# Altium PCB BugBusterMain.PcbDoc (part 1 of 6)
Units mm, origin at the board's own origin, x right, y up, seen from the top; angles counter-clockwise.
Board outline 110 x 80 mm, 6 copper layers (Top Layer, Inner Layer 1, Inner Layer 2, Inner Layer 3, Inner Layer 4, Bottom Layer), stack 1.546 mm thick; 244 components, 246 nets, 1173 pads, 1169 vias.
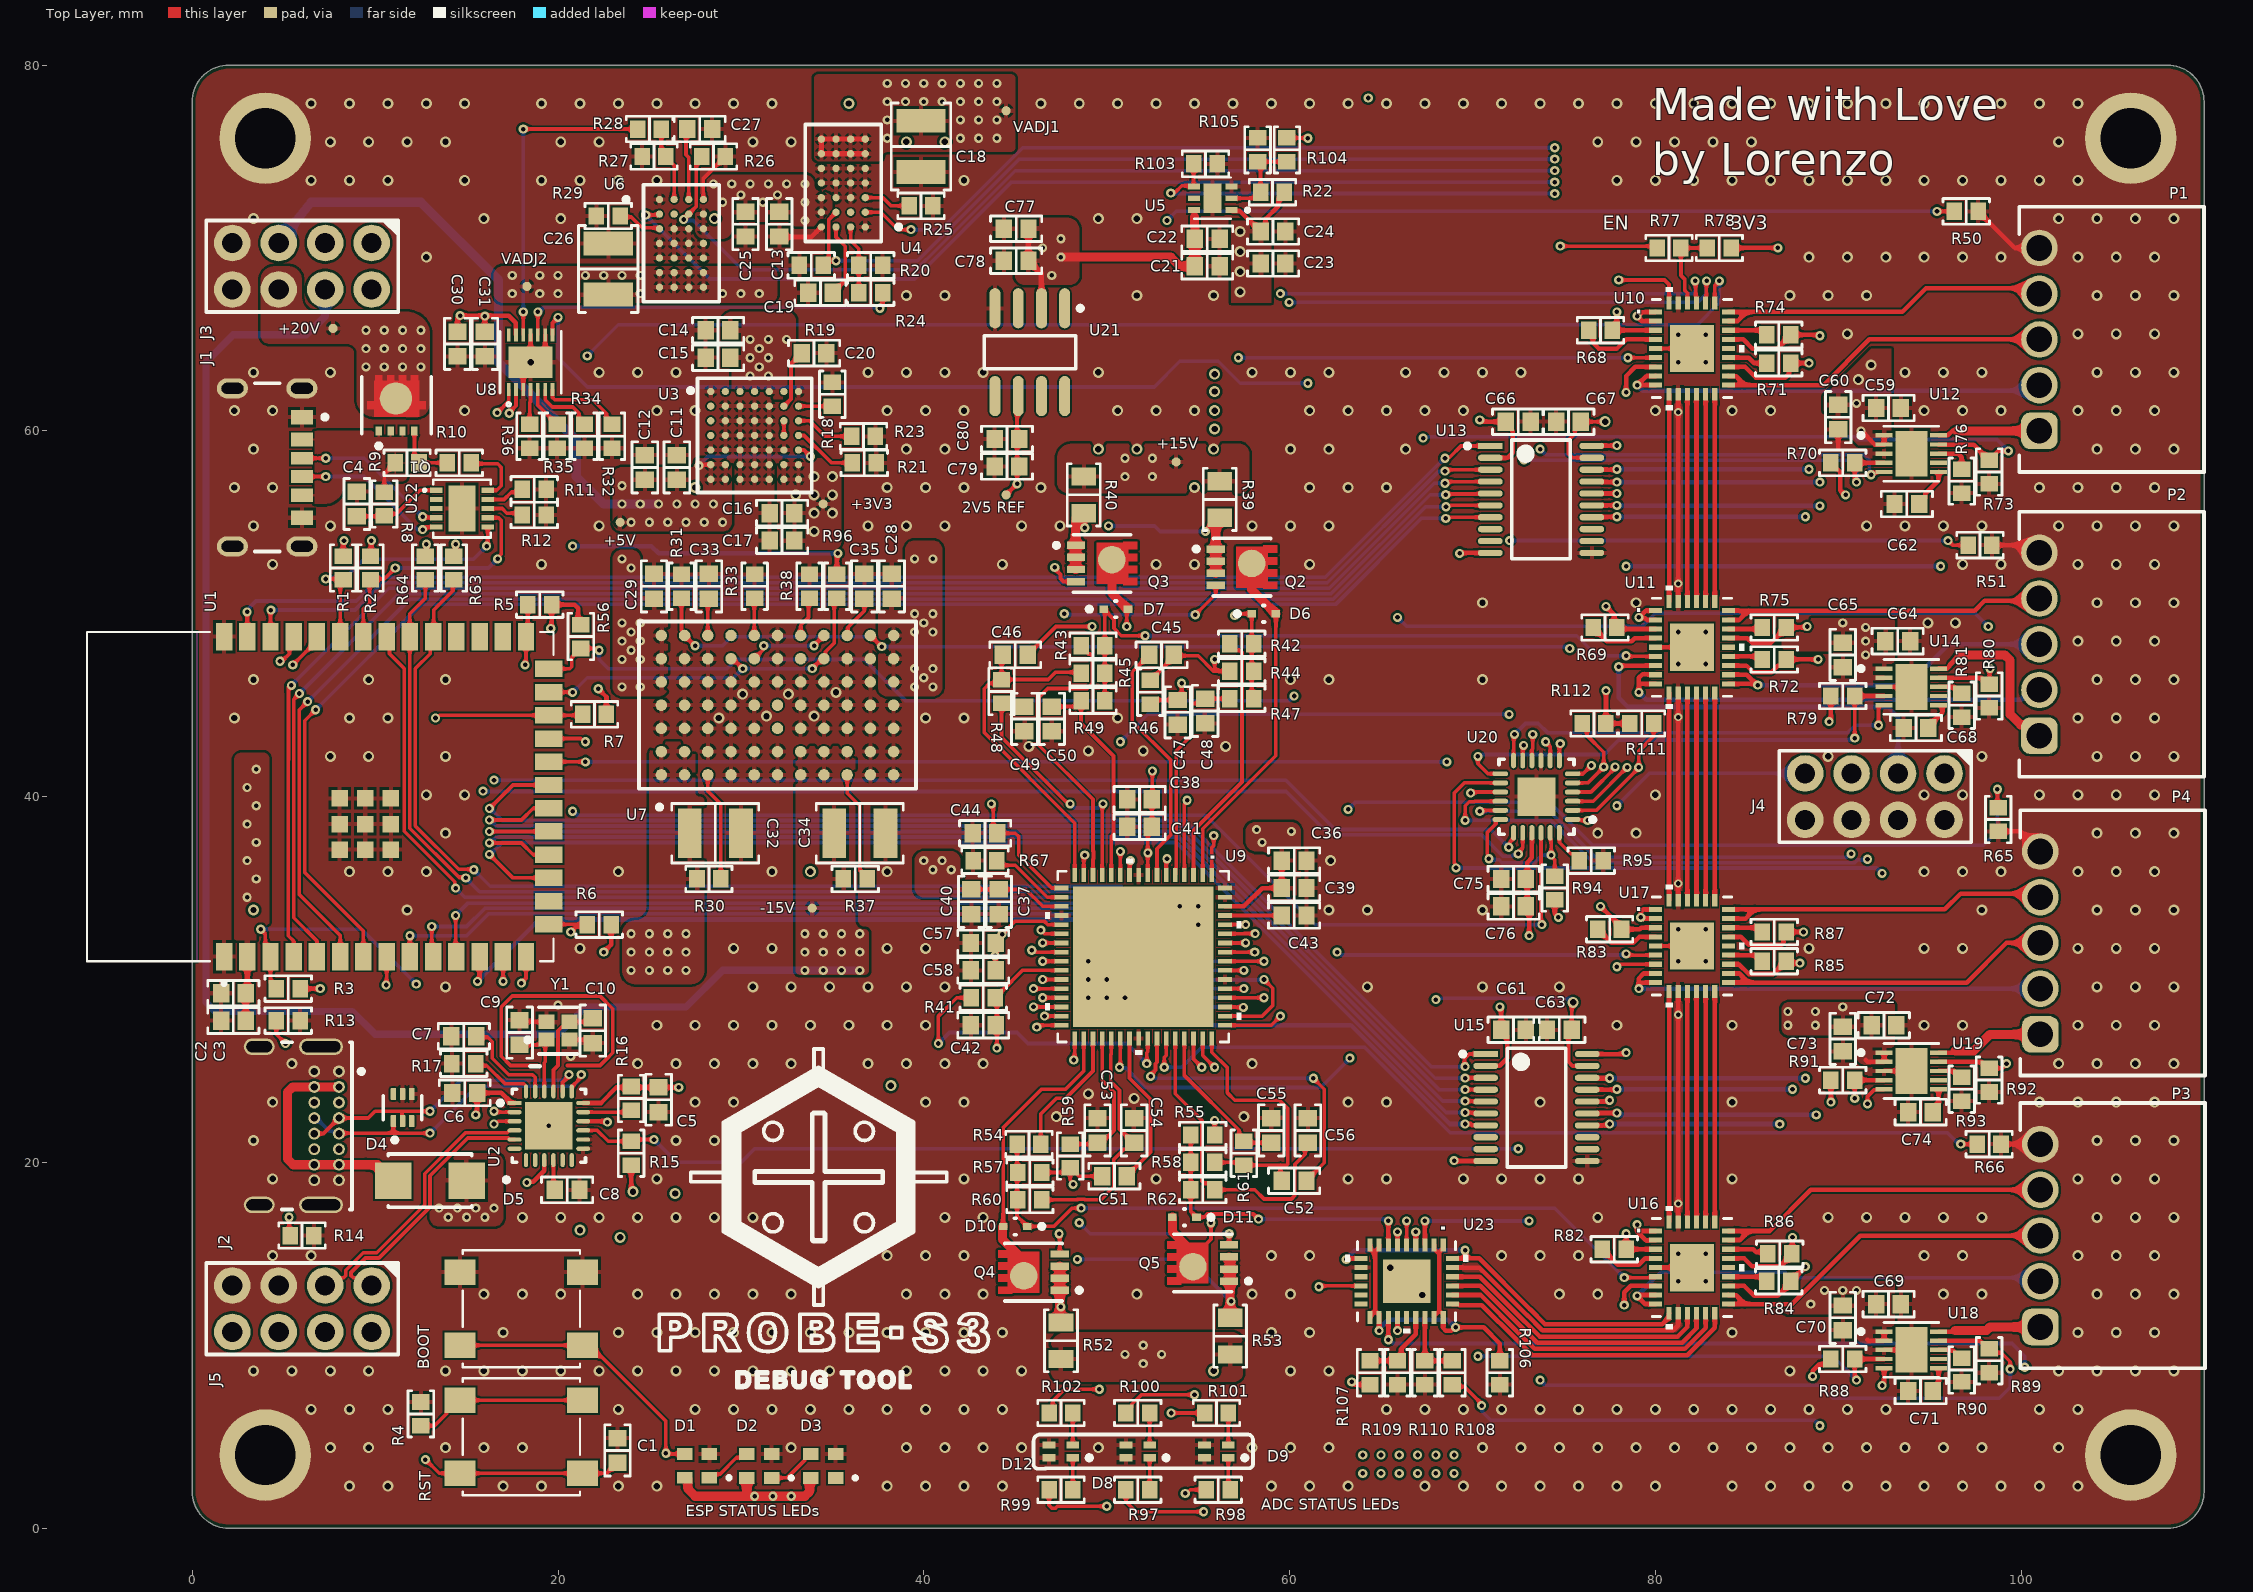
[diagram p0: Top Layer view]
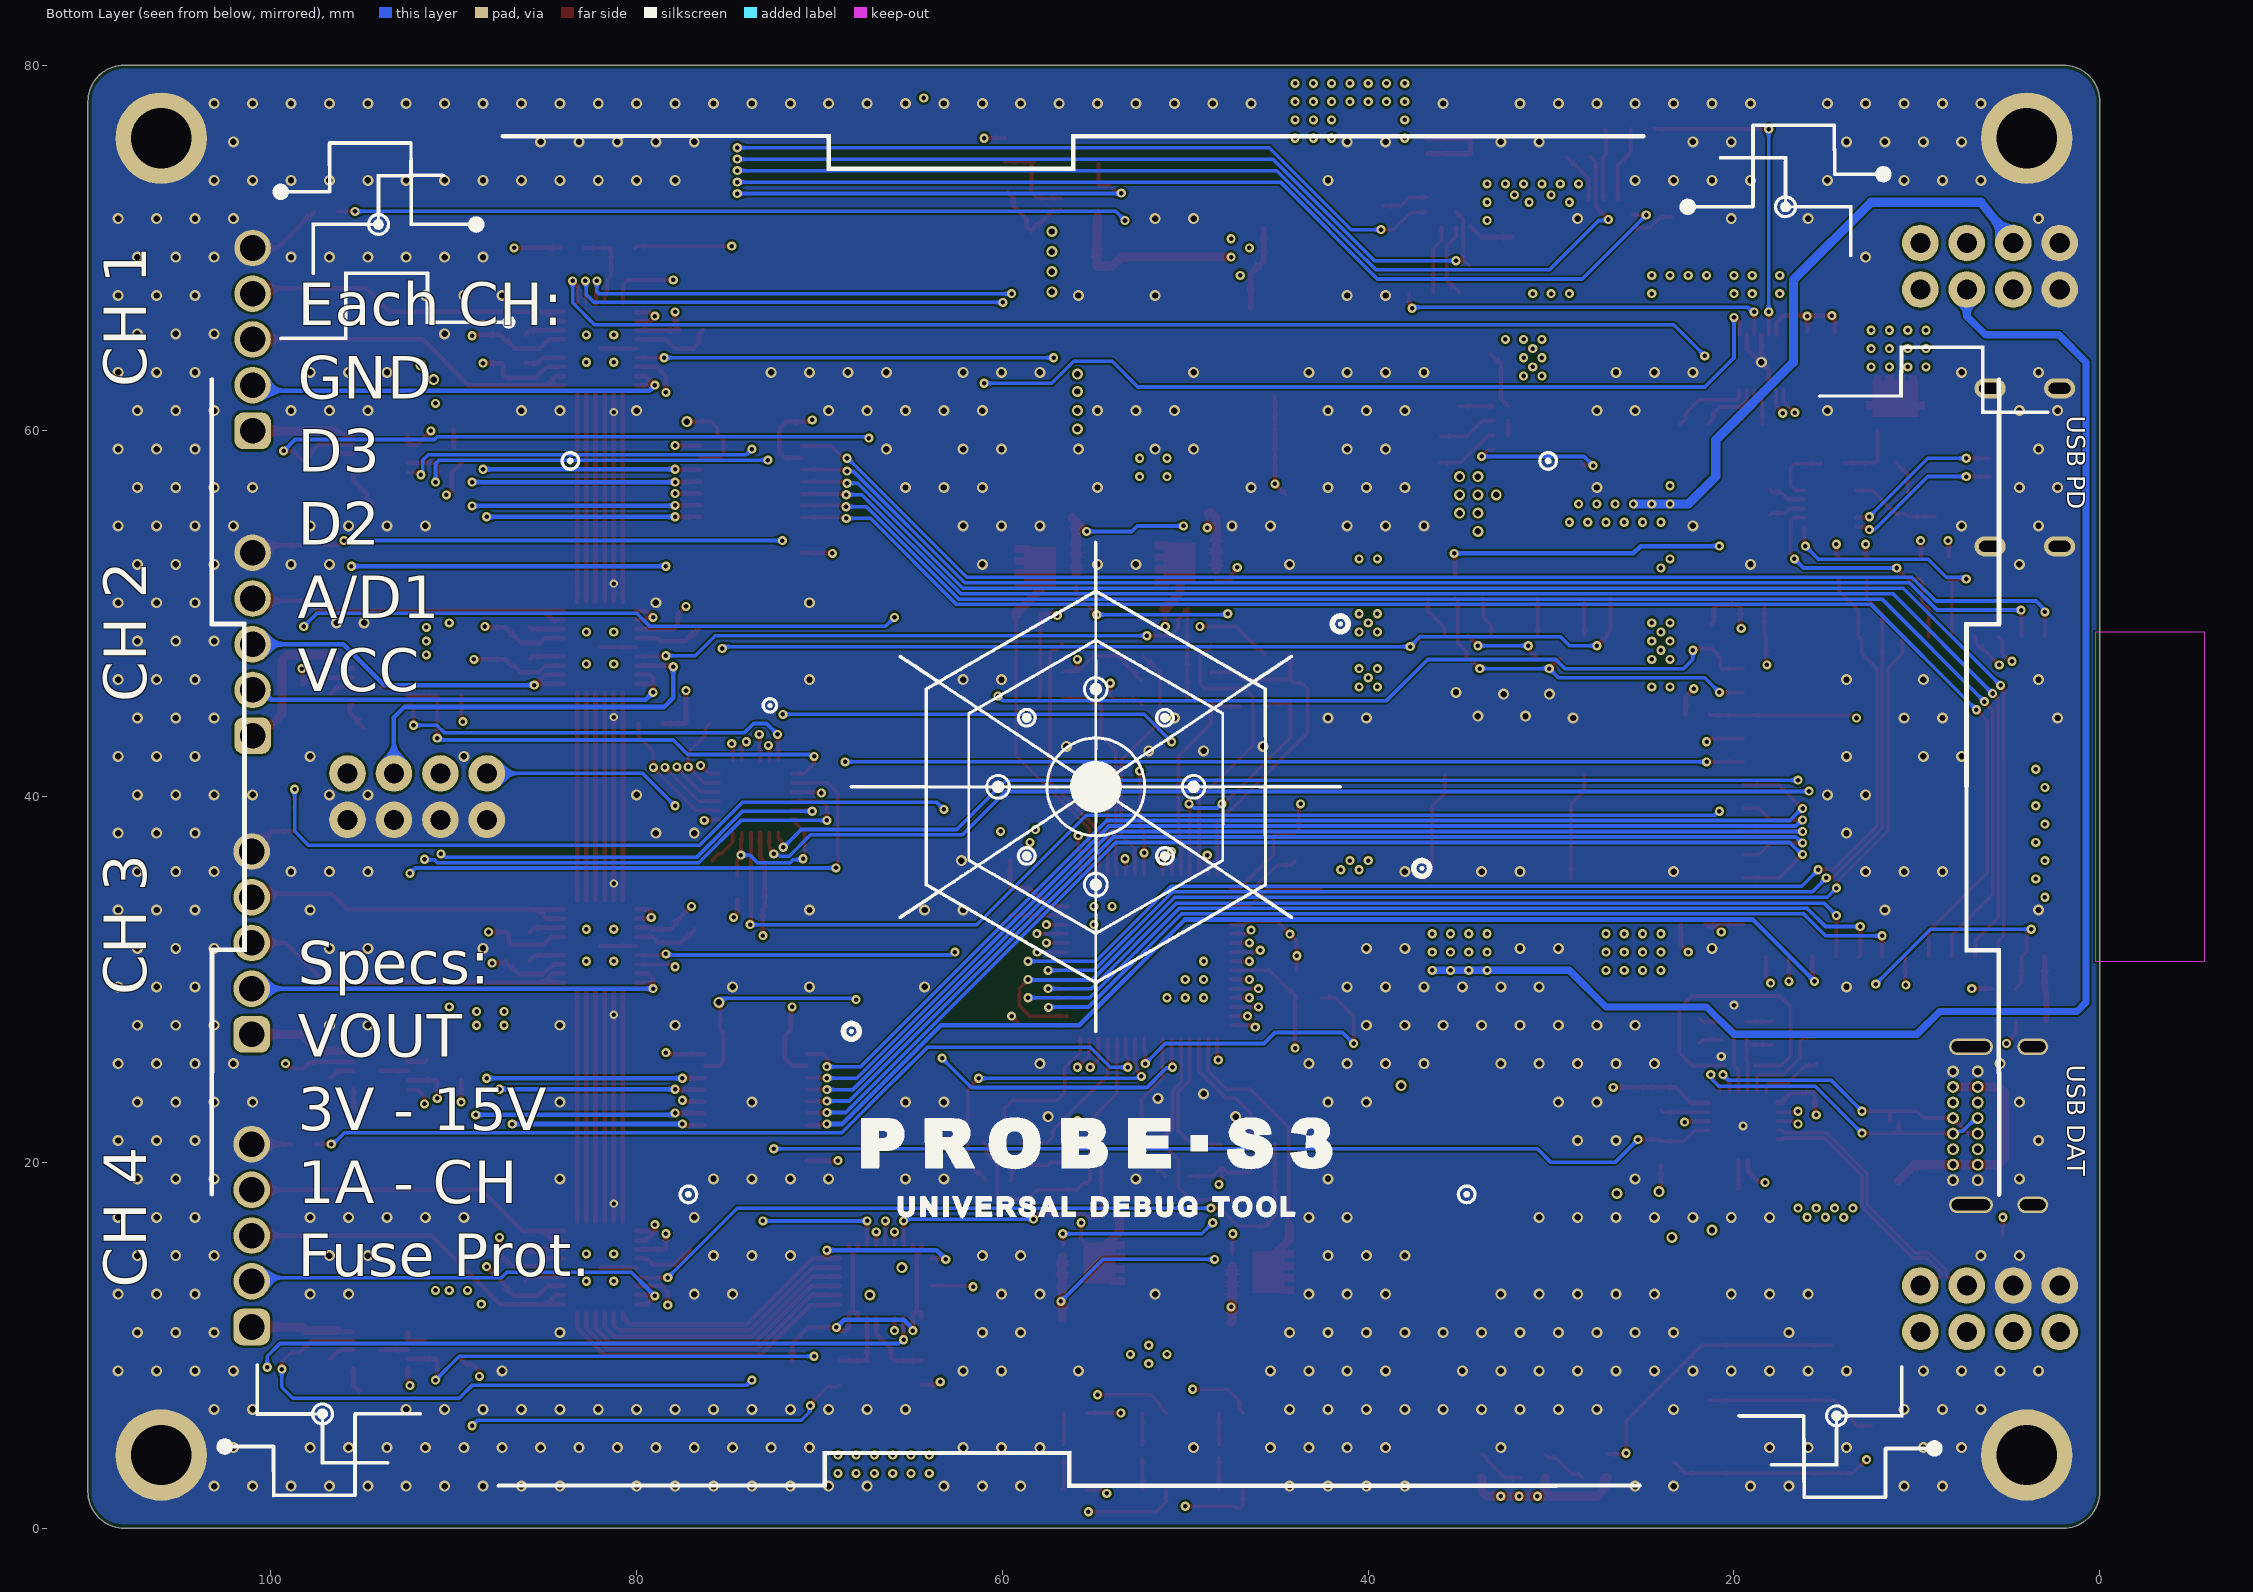
[diagram p1: Bottom Layer view, seen from below]
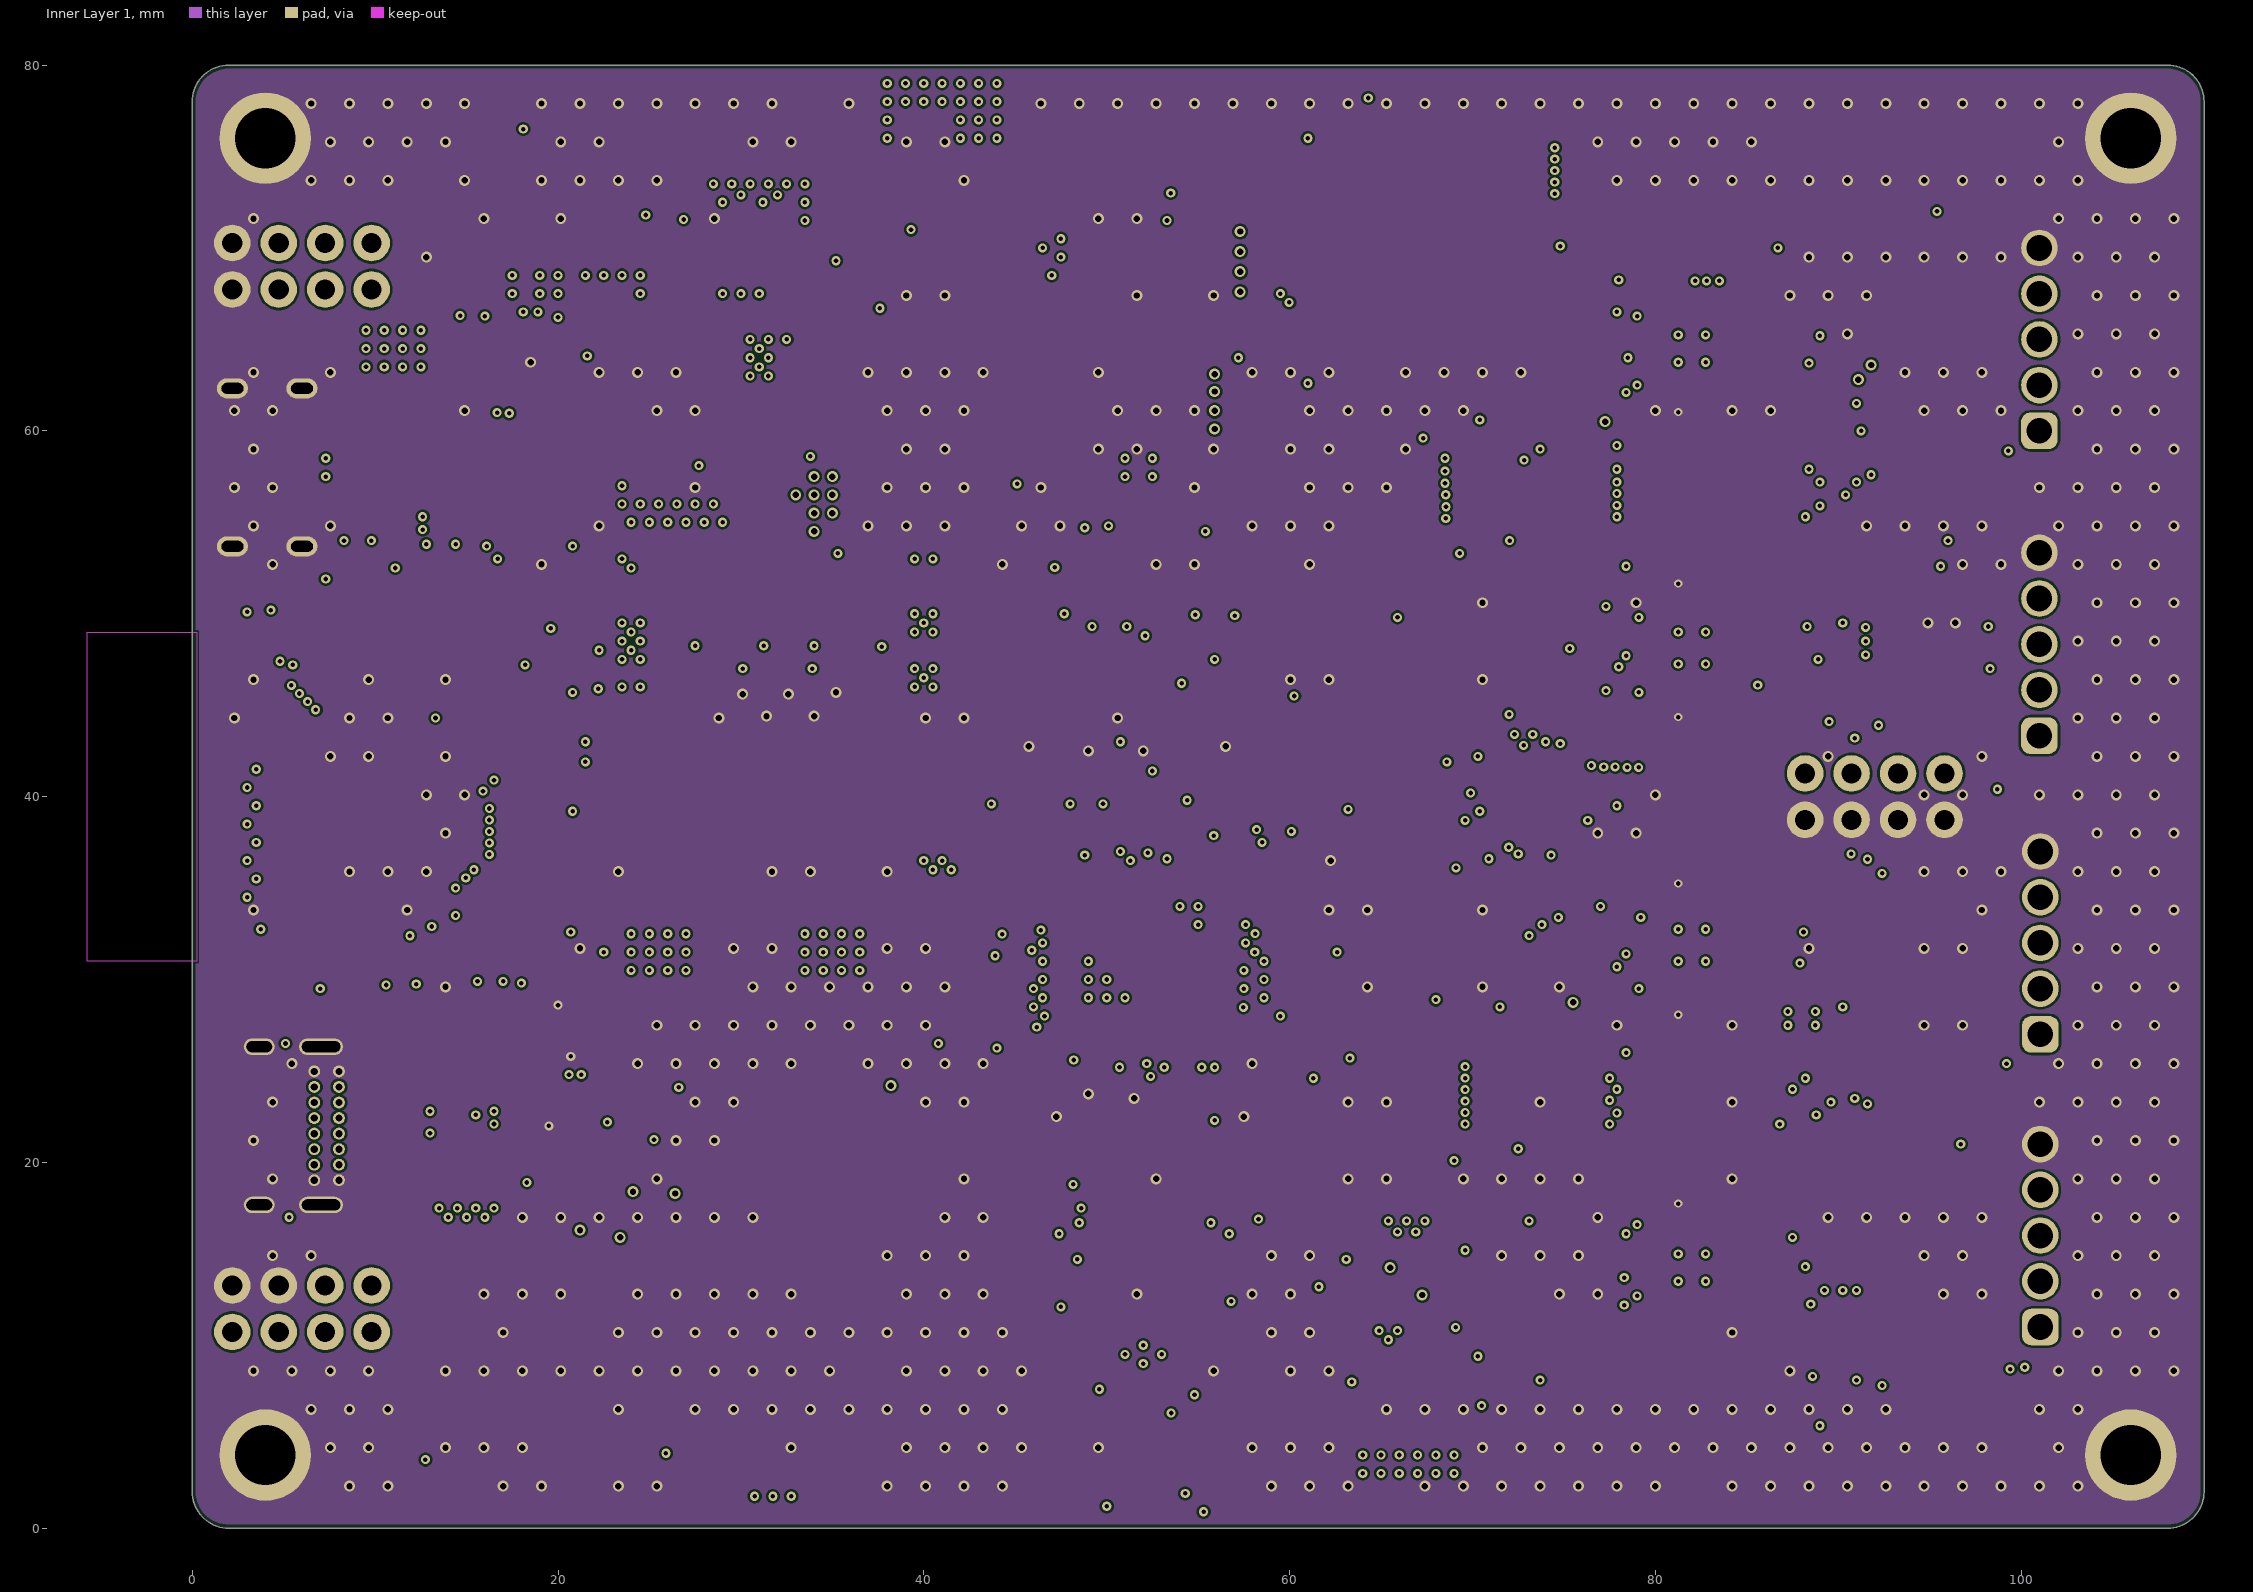
[diagram p2: Inner Layer 1]
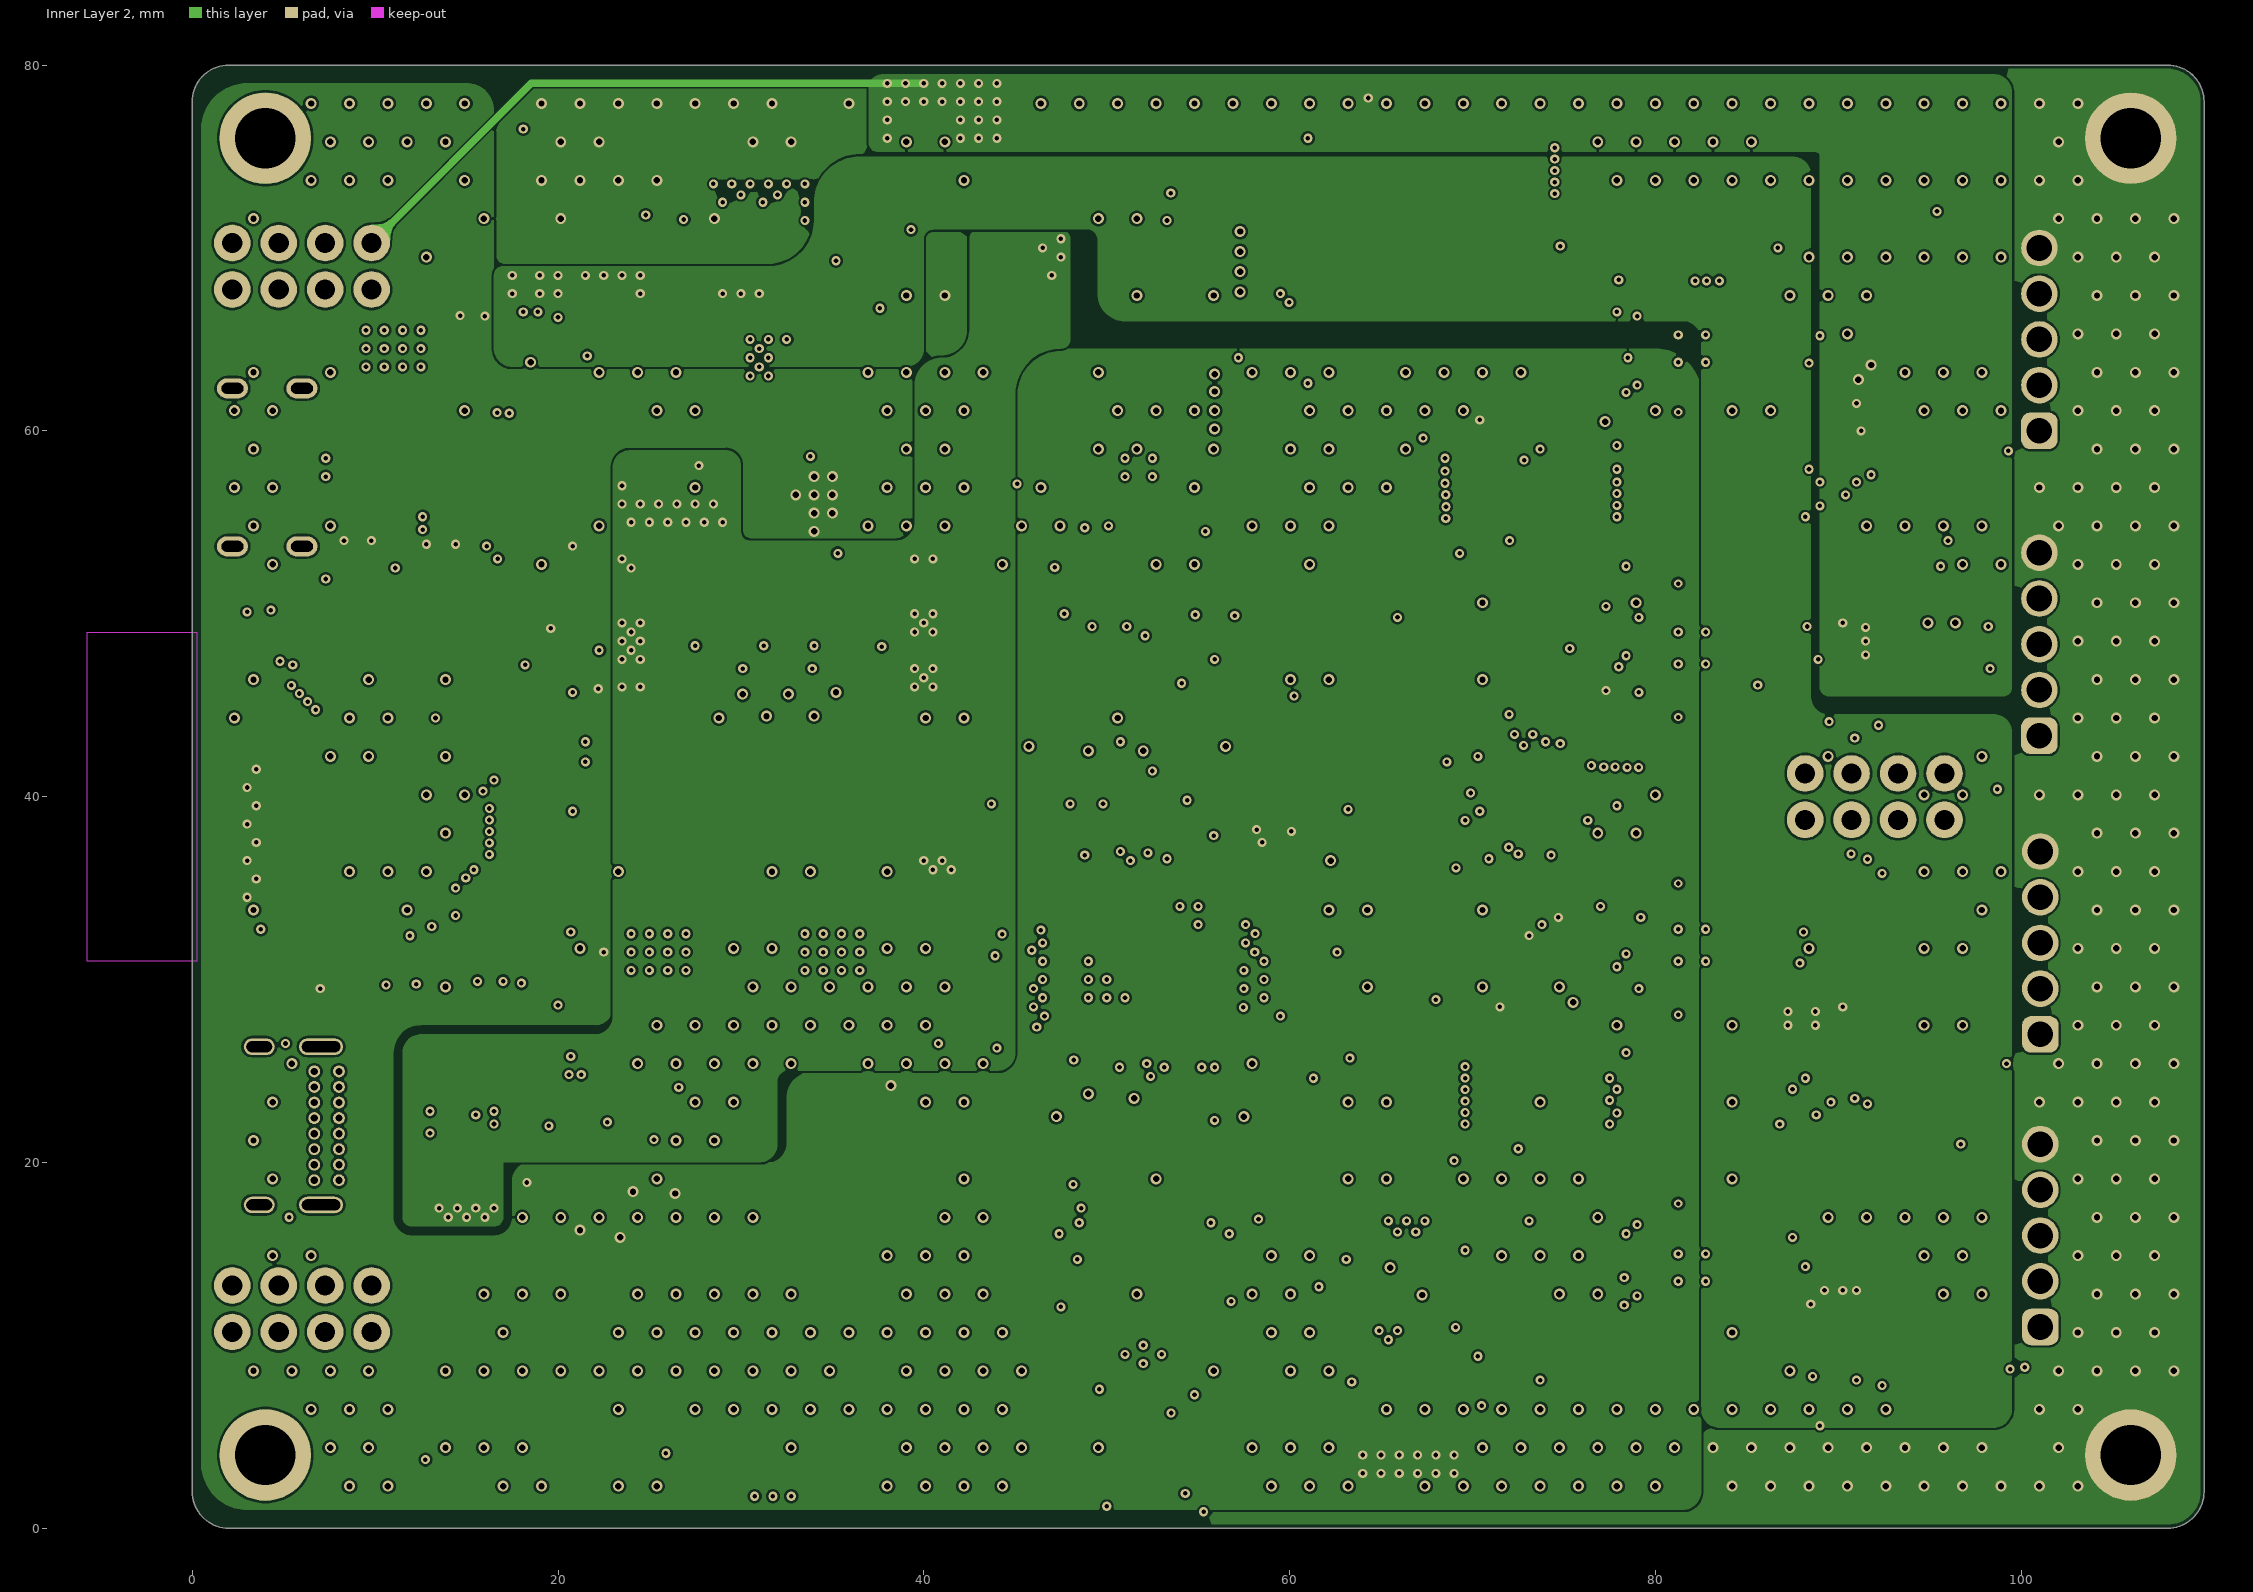
[diagram p3: Inner Layer 2]
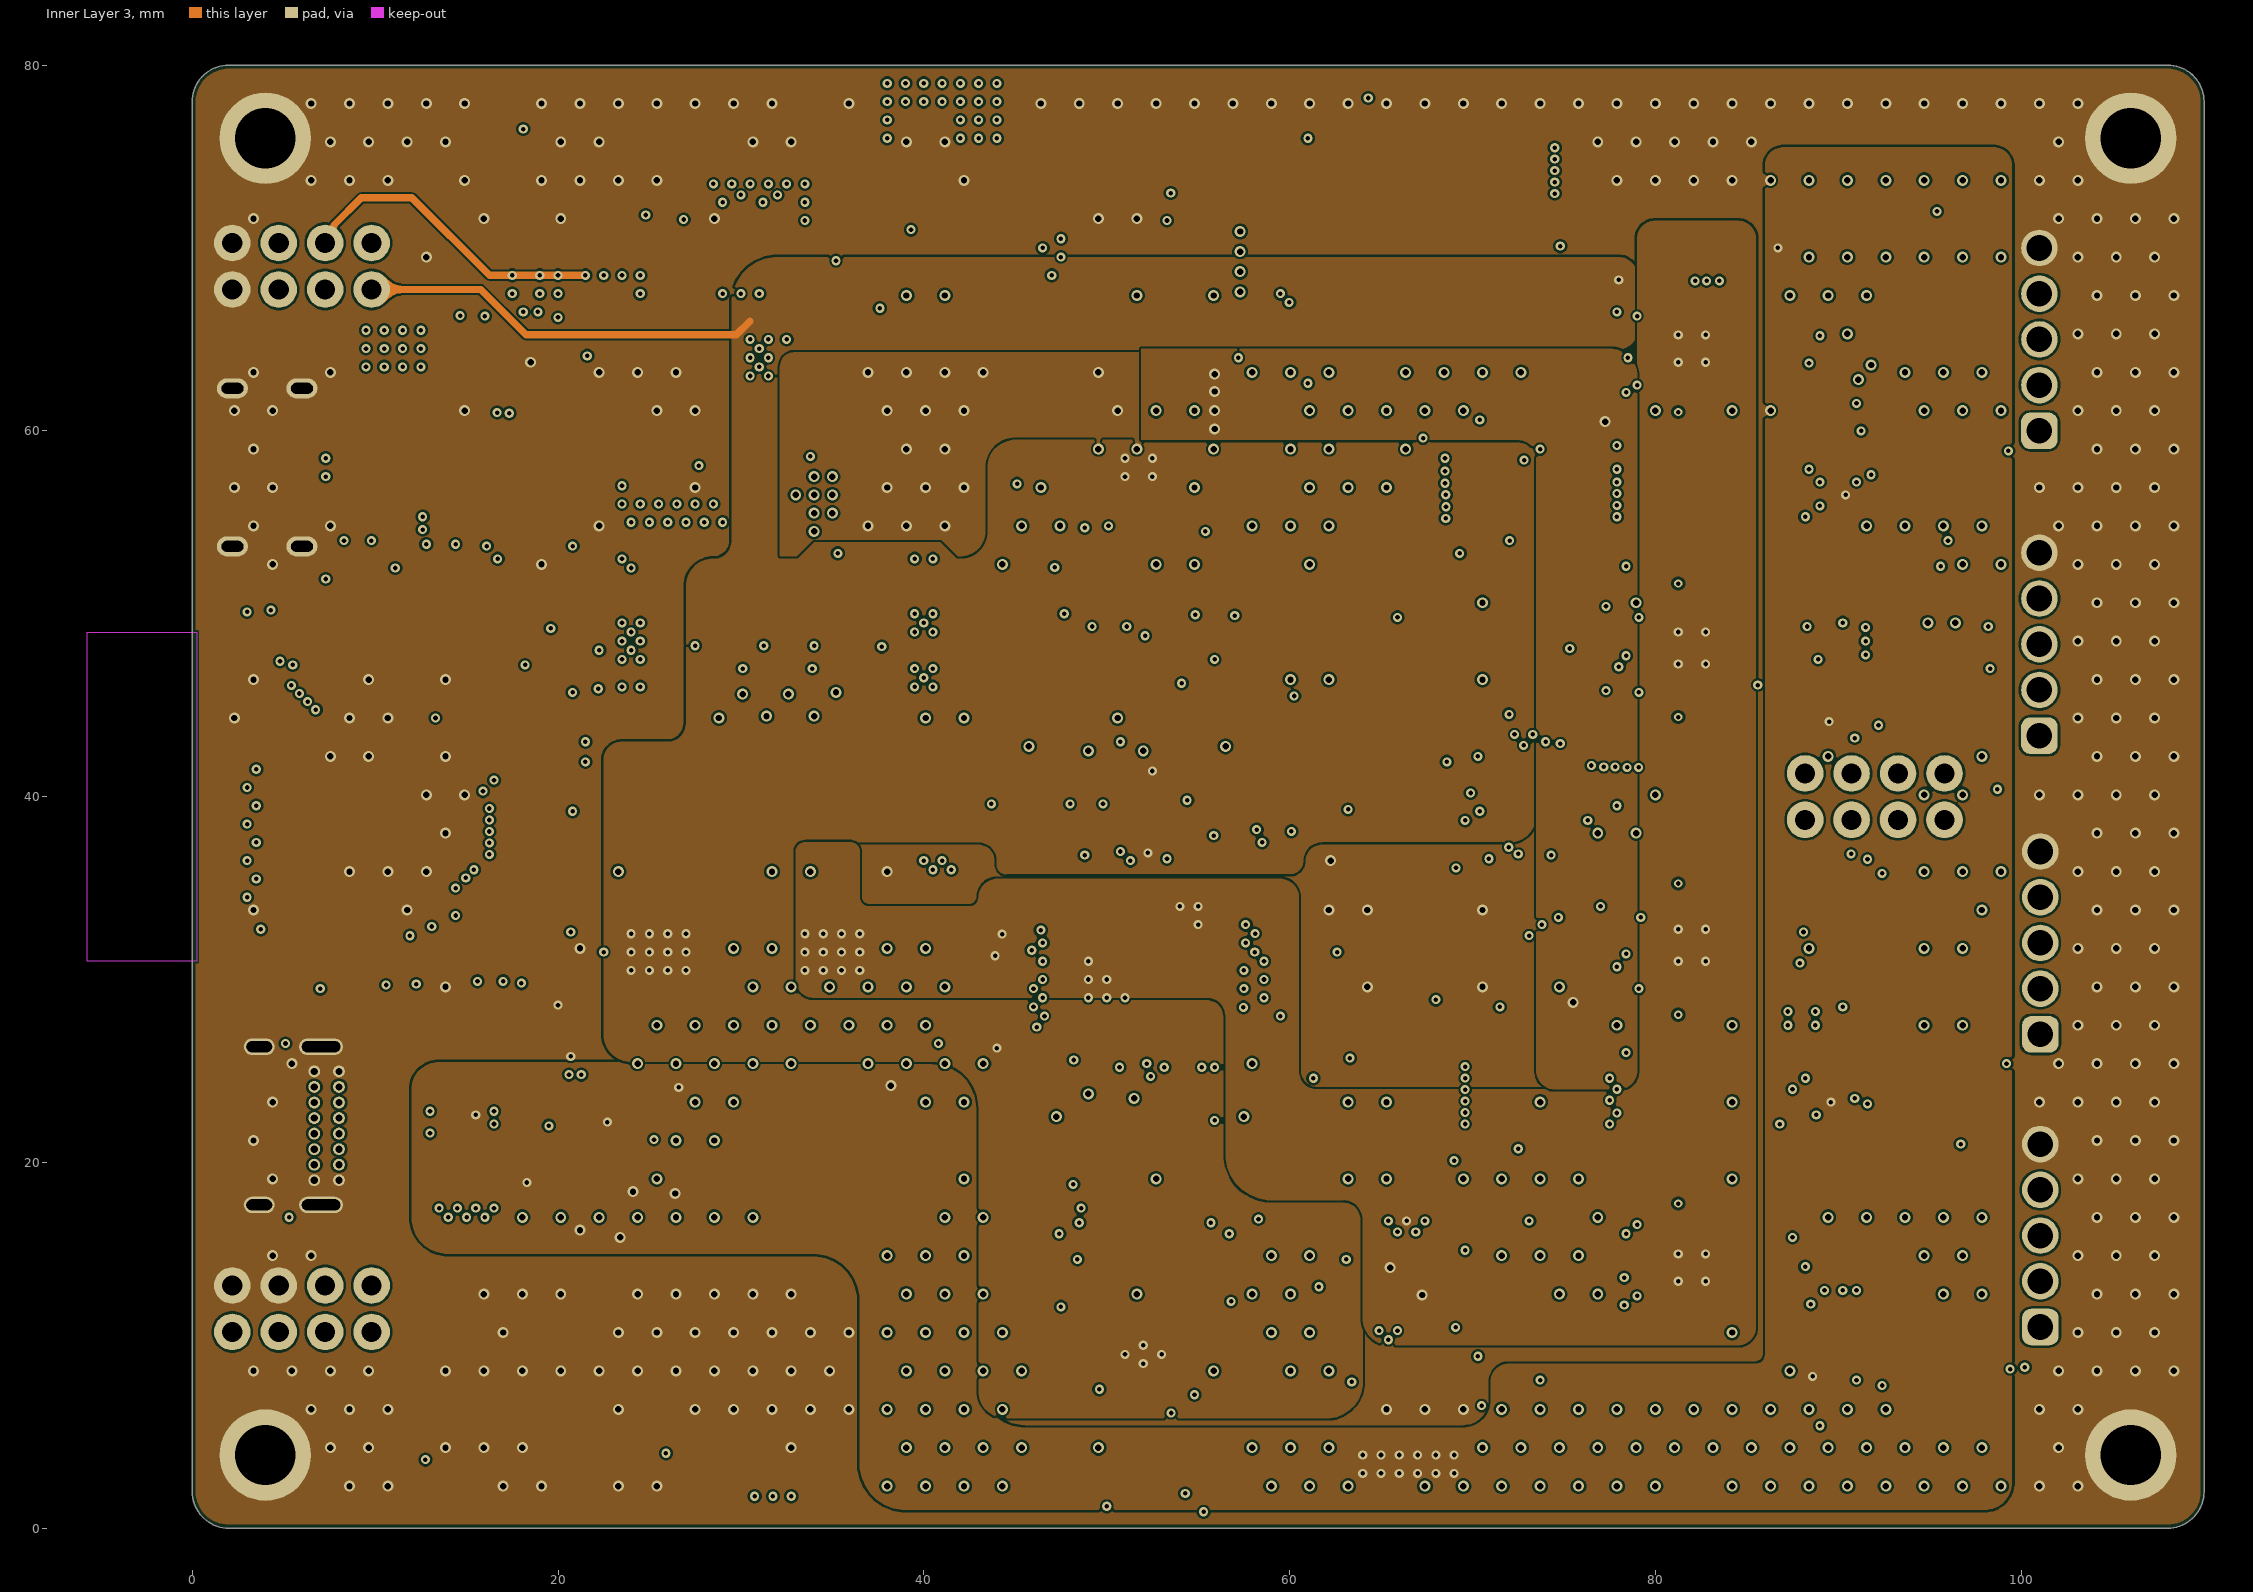
[diagram p4: Inner Layer 3]
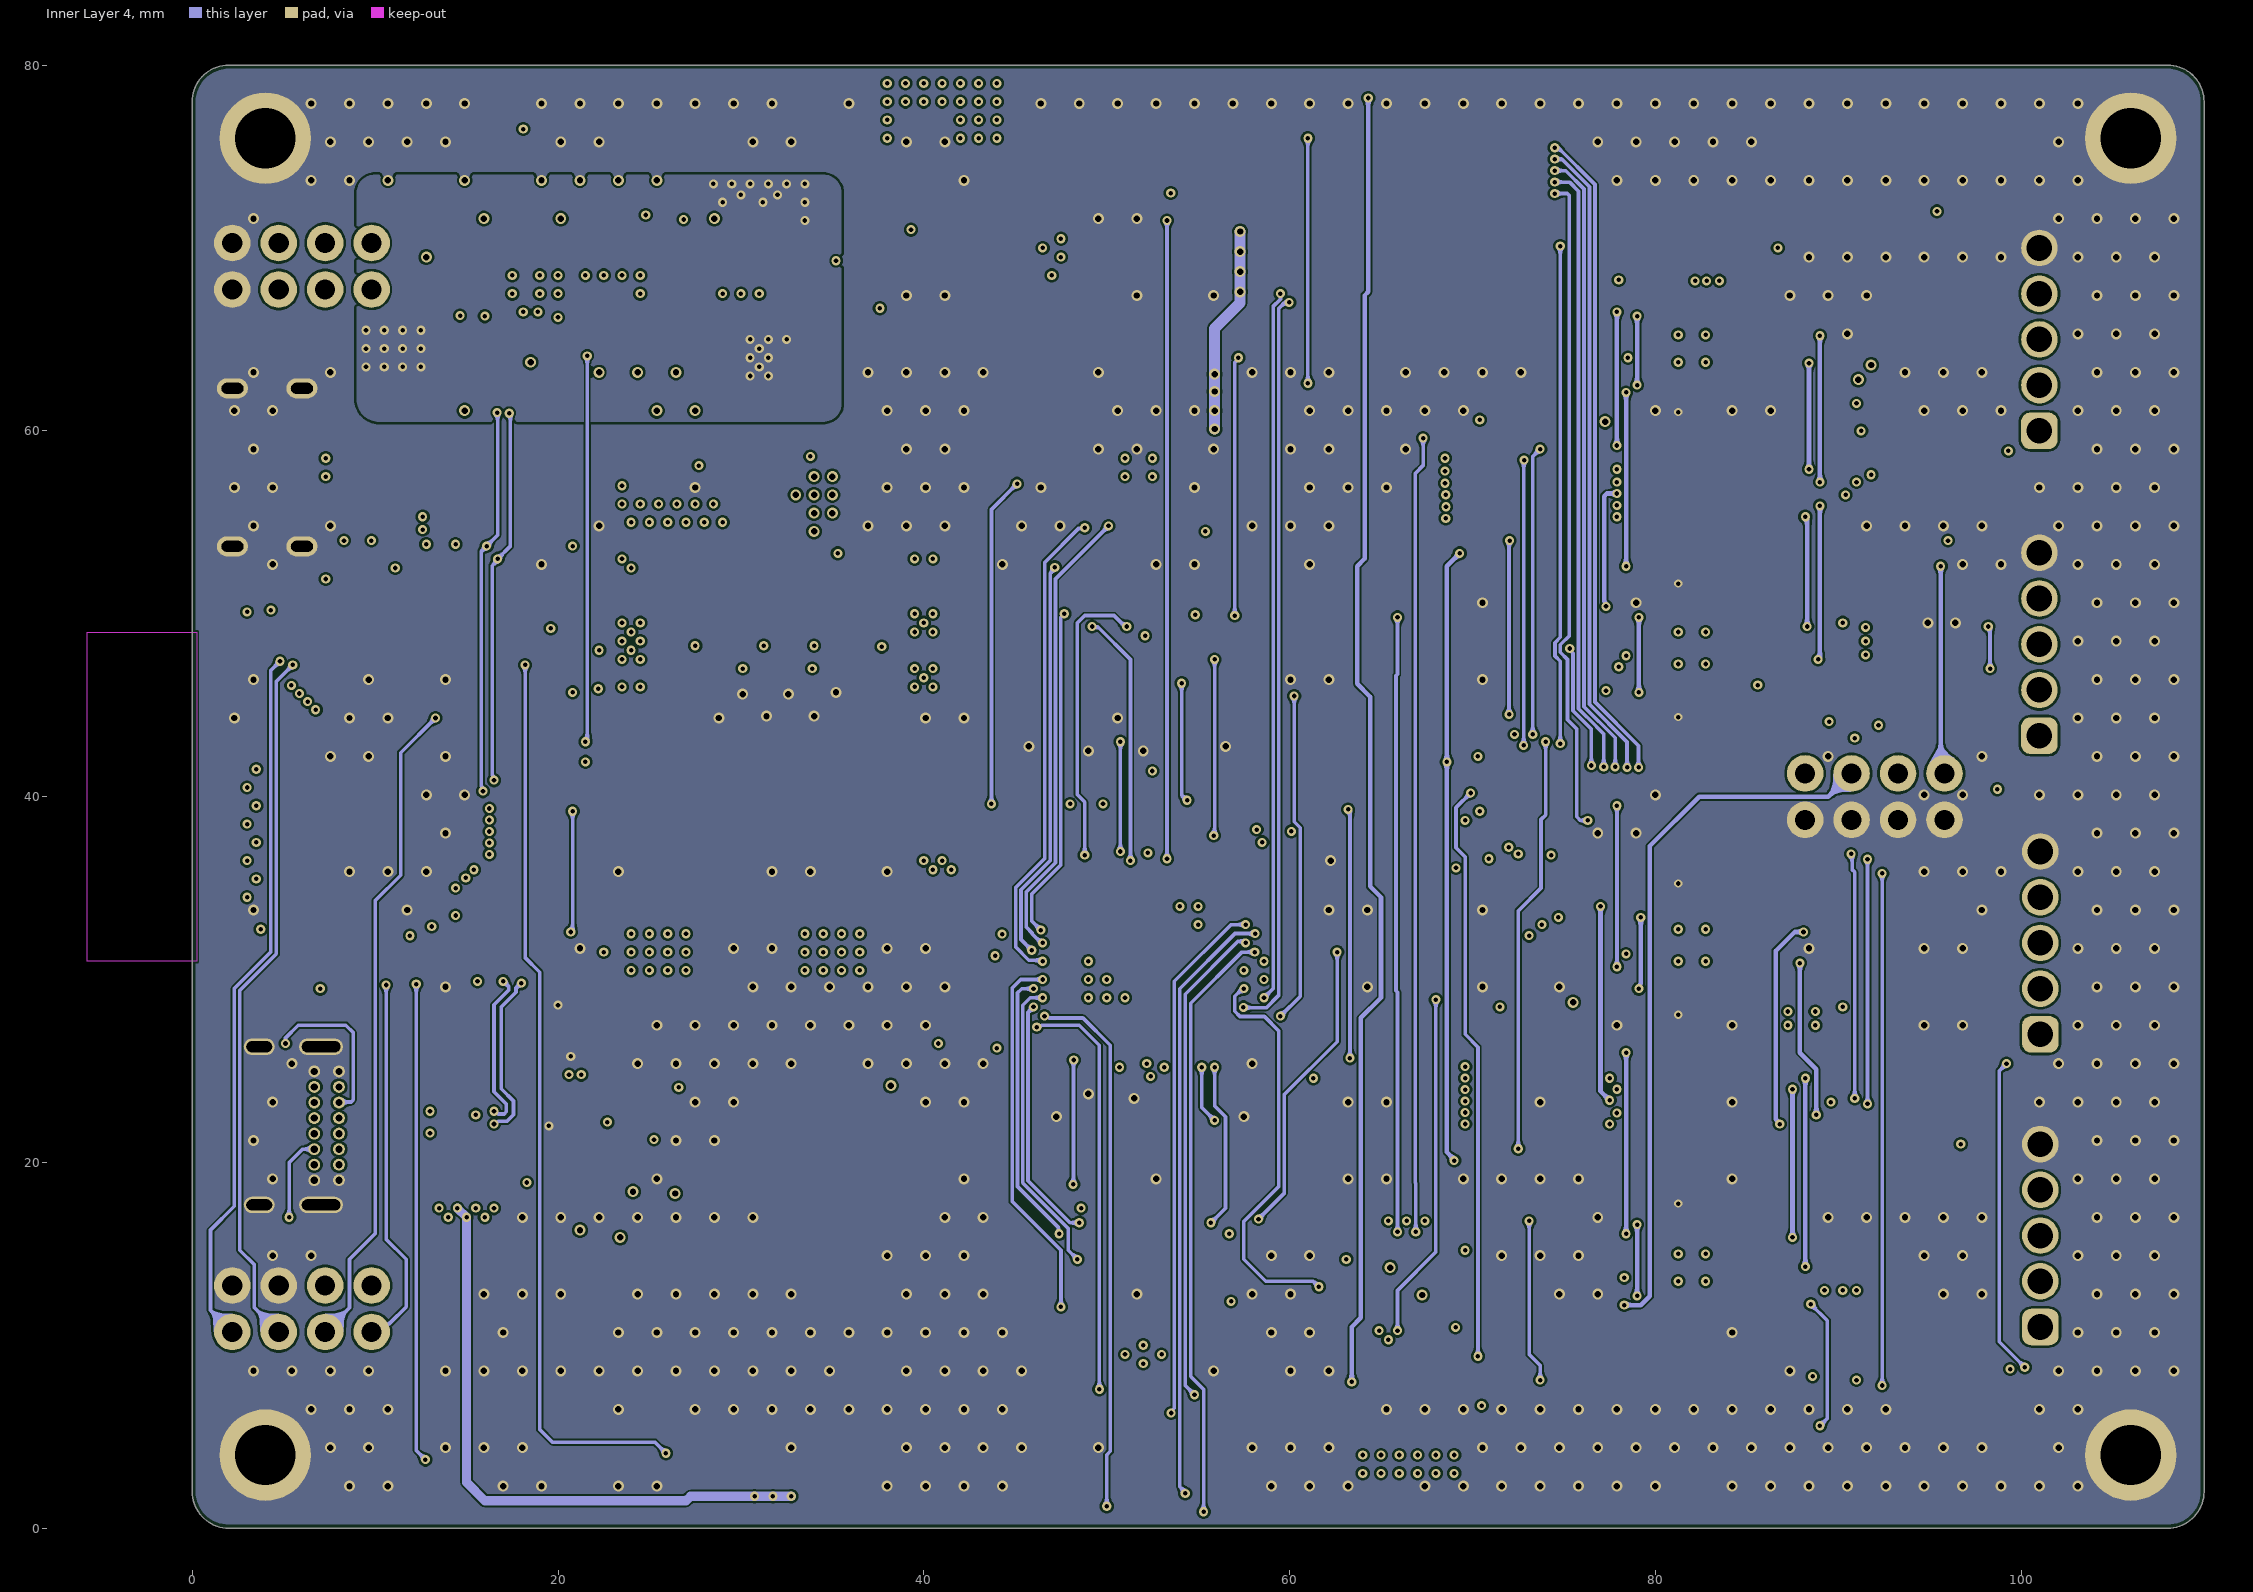
[diagram p5: Inner Layer 4]
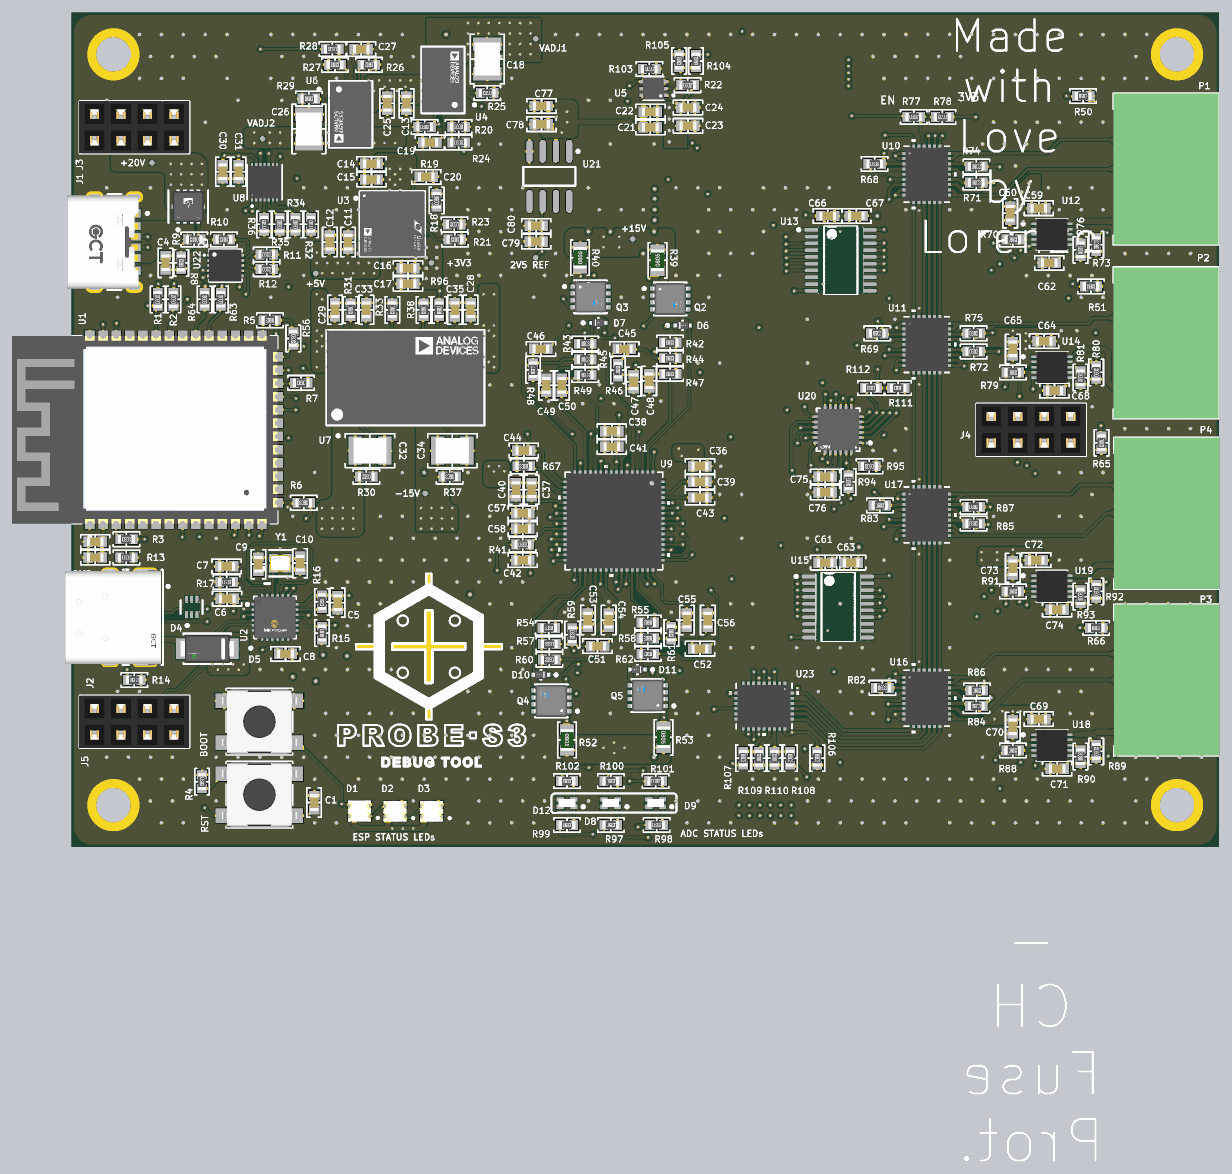
[diagram p9: 3D render of the assembled board from above, using the file's embedded part models]

## Layer stack, top to bottom
Top Solder: solder mask 0.0152, Solder Resist, Dk 3.8
Top Layer: signal copper 0.035
Dielectric 1: prepreg 0.0994, NP-155F, Dk 4.1
Inner Layer 1: signal copper 0.0152
Dielectric 2: core 0.55, NP-155F, Dk 4.41
Inner Layer 2: signal copper 0.0152
Dielectric 3: prepreg 0.1164, NP-155F, Dk 4.16
Inner Layer 3: signal copper 0.0152
Dielectric 4: core 0.55, NP-155F, Dk 4.41
Inner Layer 4: signal copper 0.0152
Dielectric 5: prepreg 0.0994, NP-155F, Dk 4.1
Bottom Layer: signal copper 0.035
Bottom Solder: solder mask 0.0152, Solder Resist, Dk 3.8

## Board outline
108,80 cw(c108,78) 110,78 110,2 cw(c108,2) 108,0 2,0 cw(c2,2) 0,2 0,40 0,78 cw(c2,78) 2,80

## Design rules (kind name [scope] priority, off if disabled: settings)
BoardOutlineClearance [All] p1: gap=0.2 ignorepadtopadclearanceinfootprint=FALSE
Clearance "Stitching No Net" [IsStitchingVia and InNet('No Net') vs (IsVia and (Not IsStitchingVia)) Or IsPad] p1: gap=0.2 ignorepadtopadclearanceinfootprint=FALSE
Clearance [All] p2: gap=0.127 ignorepadtopadclearanceinfootprint=FALSE except(0.089: Arc-Arc Arc-Track Arc-SMDPad Arc-THPad Arc-Fill Arc-Poly Arc-Region Arc-Text Track-Track Track-SMDPad Track-THPad Track-Fill Track-Poly Track-Region Track-Text SMDPad-SMDPad SMDPad-THPad SMDPad-Fill SMDPad-Poly SMDPad-Region SMDPad-Text THPad-THPad THPad-Text Fill-Text Poly-Text Region-Text Text-Text; 0.25: Arc-Hole Track-Hole SMDPad-Hole THPad-Hole Via-Hole Fill-Hole Poly-Hole Region-Hole Text-Hole)
ComponentClearance [All] p1: gap=0.089 collisioncheckmode=3 verticalgap=0.089 showdistances=TRUE
DiffPairsRouting [All] p1: maxlimit=0.089 minlimit=0.089 mostfreqgap=0.089 toplayer_minwidth=0.089 toplayer_maxwidth=1816.048 toplayer_prefwidth=0.089 midlayer1_minwidth=0.089 midlayer1_maxwidth=1816.048 midlayer1_prefwidth=0.089 midlayer2_minwidth=0.089 midlayer2_maxwidth=1816.048 midlayer2_prefwidth=0.089 midlayer3_minwidth=0.089 midlayer3_maxwidth=1816.048 midlayer3_prefwidth=0.089 midlayer4_minwidth=0.089 midlayer4_maxwidth=1816.048 midlayer4_prefwidth=0.089 bottomlayer_minwidth=0.089 bottomlayer_maxwidth=1816.048 bottomlayer_prefwidth=0.089 maxuncoupledlength=12.7
Height [All] p1: minheight=0 maxheight=1816.048 prefheight=12.7
HoleSize [All] p1: absolutevalues=TRUE maxlimit=6.3 minlimit=0.2 maxpercent=80.000 minpercent=20.000
HoleToHoleClearance [All] p1: gap=0.25 allowstackedmicrovias=FALSE
MinimumAnnularRing [All] p1: minimumring=0.076
MinimumSolderMaskSliver [All] p1: minsoldermaskwidth=0
PlaneClearance [All] p1: clearance=0.089
PlaneConnect PlaneConnectPowerPads [InPadClass('PowerPads')] p1: planeconnectstyle=Direct reliefexpansion=0.508 reliefentries=4 reliefconductorwidth=0.254 reliefairgap=0.254
PlaneConnect [All] p2: pad.planeconnectstyle=Relief pad.reliefexpansion=0.3 pad.reliefentries=4 pad.reliefconductorwidth=0.089 pad.reliefairgap=0.089 via.planeconnectstyle=Direct via.reliefexpansion=0.3 via.reliefentries=4 via.reliefconductorwidth=0.127 via.reliefairgap=0.127
PolygonConnect PolygonConnectPowerPads [All vs (InPadClass('PowerPads'))] p1: connectstyle=Direct reliefconductorwidth=0.254 reliefentries=4 polygonreliefangle="90 Angle" airgapwidth=0.254
PolygonConnect PolygonConnectPowerPads_1 [All vs InNetClass('PowerNets')] p2: thpad.connectstyle=Direct thpad.reliefconductorwidth=0.254 thpad.reliefentries=4 thpad.polygonreliefangle="90 Angle" thpad.airgapwidth=0.254 smdpad.connectstyle=Relief smdpad.reliefconductorwidth=0.25 smdpad.reliefentries=4 smdpad.polygonreliefangle="90 Angle" smdpad.airgapwidth=0.15 via.connectstyle=Direct via.reliefconductorwidth=0.254 via.reliefentries=4 via.polygonreliefangle="90 Angle" via.airgapwidth=0.254
PolygonConnect [All] p3: thpad.connectstyle=Relief thpad.reliefconductorwidth=0.089 thpad.reliefentries=4 thpad.polygonreliefangle="90 Angle" thpad.airgapwidth=0.089 smdpad.connectstyle=Relief smdpad.reliefconductorwidth=0.089 smdpad.reliefentries=4 smdpad.polygonreliefangle="90 Angle" smdpad.airgapwidth=0.089 via.connectstyle=Direct via.reliefconductorwidth=0.127 via.reliefentries=4 via.polygonreliefangle="90 Angle" via.airgapwidth=0.127
RoutingVias [All] p1: holewidth=0.2 width=0.45 viastyle="Through Hole" minholewidth=0.2 minwidth=0.45 maxholewidth=6.3 maxwidth=6.55
SilkToSilkClearance [All] p1: silktosilkclearance=0
SilkToSolderMaskClearance [IsPad] p1: minsilkscreentomaskgap=0.089 clearancetoexposedcopper=TRUE
SolderMaskExpansion [All] p1: expansion=0.075 istentingtop=FALSE
SupplyNets "Schematic Supply Nets_10" [InNet('3V3_BUCK')] p1: voltage=0.000
SupplyNets "Schematic Supply Nets_9" [InNet('2V5_REF')] p2: voltage=0.000
SupplyNets "Schematic Supply Nets_7" [InNet('+15V_ANA')] p3: voltage=0.000
SupplyNets "Schematic Supply Nets_6" [InNet('20V_USB')] p4: voltage=0.000
SupplyNets "Schematic Supply Nets_5" [InNet('VADJ1_BUCK')] p5: voltage=0.000
SupplyNets "Schematic Supply Nets_4" [InNet('GND')] p6: voltage=0.000
SupplyNets "Schematic Supply Nets_3" [InNet('VADJ2_BUCK')] p7: voltage=0.000
SupplyNets "Schematic Supply Nets_2" [InNet('3V3_ADJ')] p8: voltage=0.000
SupplyNets "Schematic Supply Nets_1" [InNet('5V_BUCK')] p9: voltage=0.000
SupplyNets "Schematic Supply Nets" [InNet('-15V_ANA')] p10: voltage=0.000
Width [All] p1: maxlimit=1816.048 minlimit=0.089 preferedwidth=0.089
20 further rules are at their usual default settings.

## Classes and differential pairs
net class PowerNets: 2V5_REF 3V3_ADJ 3V3_BUCK 5V_BUCK 20V_USB +15V_ANA -15V_ANA GND VADJ1_BUCK VADJ2_BUCK
differential pair class USBDIFF: USB_DF1 USB_DF2 USB_UP
component class USB: C4 C5 C6 C7 C8 C9 C10 D4 D5 J1 J2 Q1 R8 R9 R10 R11 R12 R13 R14 R15 R16 R17 U2 U22 U*1 Y1
component class Power: C11 C12 C13 C14 C15 C16 C17 C18 C19 C20 C21 C22 C23 C24 C25 C26 C27 C28 C29 C30 C31 C32 C33 C34 C35 R18 R19 R20 R21 R22 R23 R24 R25 R26 R27 R28 R29 R30 R31 R32 R33 R34 R35 R36 R37 R38 R96 R103 R104 R105 U3 U4 U5 U6 U7 U8
component class IOs: C59 C60 C61 C62 C63 C64 C65 C66 C67 C68 C69 C70 C71 C72 C73 C74 C75 C76 J3 J4 J5 P1 P2 P3 P4 R68 R69 R70 R71 R72 R73 R74 R75 R76 R77 R78 R79 R80 R81 R82 R83 R84 R85 R86 R87 R88 R89 R90 R91 R92 R93 R94 R95 R106 R107 R108 R109 R110 R111 R112 U10 U11 U12 U13 U14 U15 U16 U17 U18 U19 U20 U23
component class ESP32: BOOT C1 C2 C3 D1 D2 D3 R1 R2 R3 R4 R5 R6 R7 RST U1
component class Analog: C36 C37 C38 C39 C40 C41 C42 C43 C44 C45 C46 C47 C48 C49 C50 C51 C52 C53 C54 C55 C56 C57 C58 C77 C78 C79 C80 D6 D7 D8 D9 D10 D11 D12 Q2 Q3 Q4 Q5 R39 R40 R41 R42 R43 R44 R45 R46 R47 R48 R49 R50 R51 R52 R53 R54 R55 R56 R57 R58 R59 R60 R61 R62 R63 R64 R65 R66 R67 R97 R98 R99 R100 R101 R102 U9 U21
differential pair USB_UP: +USB_UP_P -USB_UP_N
differential pair USB_DF2: +USB_DF2_P -USB_DF2_N
differential pair USB_DF1: +USB_DF1_P -USB_DF1_N

## Components (designator, comment, footprint, x,y, rotation, side; value= is the part's Value field where it differs from the comment)
BOOT "430473035826" 430473035826 18,12 r0 top
C1 "1 µF" "CAP 0603_1608" 23.25,4.25 r270 top
C2 "1 µF" "CAP 0603_1608" 2.25,29.25 r0 top
C3 "22 µF" "CAP 0603_1608" 2.25,27.75 r0 top
C4 "1 µF" "CAP 0603_1608" 9,56 r270 top
C5 "1 µF" "CAP 0603_1608" 25.5,23.425 r90 top
C6 "0.1 µF" "CAP 0603_1608" 14.9,23.8 r0 top
C7 "0.1 µF" "CAP 0603_1608" 14.85,26.9 r0 top
C8 "1 µF" "CAP 0603_1608" 20.5,18.5 r180 top
C9 "8 pF" "CAP 0603_1608" 17.9,27.1 r270 top
C10 "8 pF" "CAP 0603_1608" 21.9,27.2 r90 top
C11 "0.1 µF" "CAP 0603_1608" 26.5,58 r270 top
C12 "22 µF" "CAP 0603_1608" 24.75,58 r270 top
C13 "1 µF" "CAP 0603_1608" 32.1,71.3 r90 top
C14 "4.7 µF" "CAP 0603_1608" 28.75,65.5 r0 top
C15 "0.1 µF" "CAP 0603_1608" 28.75,64 r0 top
C16 "0.1 µF" "CAP 0603_1608" 32.25,55.5 r0 top
C17 "22 µF" "CAP 0603_1608" 32.25,54 r0 top
C18 "22µF" "CAP 1210_3225 - 2.8MM" 39.85,75.55 r90 top
C19 "10000 pF" "CAP 0603_1608" 34.35,67.55 r0 top
C20 "10000 pF" "CAP 0603_1608" 34,64.25 r180 top
C21 "1 µF" "CAP 0603_1608" 55.5,69 r180 top
C22 "1000 pF" "CAP 0603_1608" 55.5,70.5 r180 top
C23 "1 µF" "CAP 0603_1608" 59.1,69.15 r180 top
C24 "1000 pF" "CAP 0603_1608" 59.1,70.9 r180 top
C25 "1 µF" "CAP 0603_1608" 30.25,71.3 r90 top
C26 "22µF" "CAP 1210_3225 - 2.8MM" 22.75,68.85 r270 top
C27 "10000 pF" "CAP 0603_1608" 27.75,76.5 r180 top
C28 "4.7 µF" "CAP 0603_1608" 38.25,51.5 r270 top
C29 "4.7 µF" "CAP 0603_1608" 25.25,51.5 r270 top
C30 "1 µF" "CAP 0603_1608" 14.5,64.75 r90 top
C31 "1000 pF" "CAP 0603_1608" 16,64.75 r90 top
C32 "22µF" "CAP 1210_3225 - 2.8MM" 28.6,38 r180 top
C33 "0.1 µF" "CAP 0603_1608" 28.25,51.5 r270 top
C34 "47 µF" "CAP 1210_3225 - 1MM" 36.5,38 r0 top
C35 "0.1 µF" "CAP 0603_1608" 36.75,51.5 r270 top
C36 "10 µF" "CAP 0603_1608" 60.25,36.5 r0 top
C37 "0.1 µF" "CAP 0603_1608" 44.1,34.25 r270 top
C38 "10 µF" "CAP 0603_1608" 51.8,39.85 r180 top
C39 "0.1 µF" "CAP 0603_1608" 60.25,35 r0 top
C40 "10 µF" "CAP 0603_1608" 42.6,34.25 r270 top
C41 "0.1 µF" "CAP 0603_1608" 51.8,38.35 r180 top
C42 "10 µF" "CAP 0603_1608" 43.25,27.5 r0 top
C43 "2.2 µF" "CAP 0603_1608" 60.25,33.5 r0 top
C44 "0.022 µF" "CAP 0603_1608" 43.35,38 r0 top
C45 "220pF" "CAP 0603_1608" 53,47.75 r0 top
C46 "220pF" "CAP 0603_1608" 45,47.75 r180 top
C47 "4700 pF" "CAP 0603_1608" 53.883,44.608 r270 top
C48 "4700 pF" "CAP 0603_1608" 55.383,44.683 r270 top
C49 "4700 pF" "CAP 0603_1608" 45.5,44.25 r270 top
C50 "4700 pF" "CAP 0603_1608" 47,44.25 r270 top
C51 "220pF" "CAP 0603_1608" 50.425,19.25 r180 top
C52 "220pF" "CAP 0603_1608" 60.25,19 r180 top
C53 "4700 pF" "CAP 0603_1608" 49.5,21.75 r90 top
C54 "4700 pF" "CAP 0603_1608" 51.5,21.75 r90 top
C55 "4700 pF" "CAP 0603_1608" 59,21.75 r90 top
C56 "4700 pF" "CAP 0603_1608" 61,21.75 r90 top
C57 "0.1 µF" "CAP 0603_1608" 43.25,32 r0 top
C58 "10 µF" "CAP 0603_1608" 43.25,30.5 r0 top
C59 "1 µF" "CAP 0603_1608" 92.75,61.25 r180 top
C60 "0.1 µF" "CAP 0603_1608" 90,60.75 r90 top
C61 "0.1 µF" "CAP 0603_1608" 72.25,27.25 r180 top
C62 "1200 pF" "CAP 0603_1608" 93.75,56 r0 top
C63 "0.1 µF" "CAP 0603_1608" 74.75,27.25 r0 top
C64 "1 µF" "CAP 0603_1608" 93.25,48.5 r180 top
C65 "0.1 µF" "CAP 0603_1608" 90.25,47.75 r90 top
C66 "0.1 µF" "CAP 0603_1608" 72.5,60.5 r180 top
C67 "0.1 µF" "CAP 0603_1608" 75.25,60.5 r0 top
C68 "1200 pF" "CAP 0603_1608" 94.25,43.75 r0 top
C69 "1 µF" "CAP 0603_1608" 92.75,12.25 r180 top
C70 "0.1 µF" "CAP 0603_1608" 90.25,11.5 r90 top
C71 "1200 pF" "CAP 0603_1608" 94.5,7.5 r0 top
C72 "1 µF" "CAP 0603_1608" 92.5,27.5 r180 top
C73 "0.1 µF" "CAP 0603_1608" 90.25,26.75 r90 top
C74 "1200 pF" "CAP 0603_1608" 94.5,22.75 r0 top
C75 "1 µF" "CAP 0603_1608" 72.25,35.5 r0 top
C76 "0.1 µF" "CAP 0603_1608" 72.25,34 r0 top
C77 "1 µF" "CAP 0603_1608" 45.05,71.05 r0 top
C78 "0.1 µF" "CAP 0603_1608" 45.05,69.3 r0 top
C79 "1 µF" "CAP 0603_1608" 44.55,58.05 r0 top
C80 "1 µF" "CAP 0603_1608" 44.55,59.55 r0 top
D1 "XL-2020RGBC-WS2812B" LED_XL-2020RGBC-WS2812B 27.604,3.408 r180 top
D2 "XL-2020RGBC-WS2812B" LED_XL-2020RGBC-WS2812B 31,3.4 r180 top
D3 "XL-2020RGBC-WS2812B" LED_XL-2020RGBC-WS2812B 34.5,3.4 r180 top
D4 "TPD2E1B06DRLR" FP-DRL0006A-MFG 11.5,23 r90 top
D5 "NRVBA340T3G" FP-403D-MFG 13,19 r180 top
D6 "NSR0240V2T5G" FP-502-MFG 58.59,50 r0 top
D7 "NSR0240V2T5G" FP-502-MFG 50.5,50.25 r0 top
D8 "HSMF-C165" FP-HSMF-C165-MFG 51.7,4.2 r180 top
D9 "HSMF-C165" FP-HSMF-C165-MFG 56,4.2 r180 top
D10 "NSR0240V2T5G" FP-502-MFG 45,16.5 r180 top
D11 "NSR0240V2T5G" FP-502-MFG 54.25,17 r180 top
D12 "HSMF-C165" FP-HSMF-C165-MFG 47.5,4.2 r180 top
J1 "USB4125-GF-A-0190" FP-USB4125-GF-A-0190-MFG 3,58 r270 top
J2 "USB4085-GF-A" FP-USB4085-GF-A-MFG 4,22 r270 top
J3 "M20-7830442" "HARWIN M20-7830445" 6,69 r270 top
J4 "M20-7830442" "HARWIN M20-7830445" 92,40 r270 top
J5 "M20-7830442" "HARWIN M20-7830445" 6,12 r270 top
P1 "691382010005" 691382010005 104.95,65 r90 top
P2 "691382010005" 691382010005 104.95,48.333 r90 top
P3 "691382010005" 691382010005 105,16 r90 top
P4 "691382010005" 691382010005 105,32 r90 top
Q1 "AONR21307" FP-DFN3x3A_8L_EP1_P-MFG 11.175,61.4 r0 top
Q2 "SI7113ADN-T1-GE3" FP-S16-2667-SINGLE-MFG 57.397,52.547 r0 top
Q3 "SI7113ADN-T1-GE3" FP-S16-2667-SINGLE-MFG 49.75,52.75 r0 top
Q4 "SI7113ADN-T1-GE3" FP-S16-2667-SINGLE-MFG 46,14 r180 top
Q5 "SI7113ADN-T1-GE3" FP-S16-2667-SINGLE-MFG 55.25,14.5 r180 top
R1 "5.1 kOhms" "RES 0603_1608" 8.25,52.5 r90 top
R2 "5.1 kOhms" "RES 0603_1608" 9.75,52.5 r90 top
R3 "10 kOhms" "RES 0603_1608" 5.25,29.5 r0 top
R4 "10 Ohms" "RES 0603_1608" 12.5,6.25 r270 top
R5 "10 kOhms" "RES 0603_1608" 19,50.5 r180 top
R6 "10 kOhms" "RES 0603_1608" 22.25,33 r180 top
R7 "10 kOhms" "RES 0603_1608" 22,44.5 r180 top
R8 "10 Ohms" "RES 0603_1608" 10.5,56 r90 top
R9 "49.9 kOhms" "RES 0603_1608" 11.75,58.25 r180 top
R10 "5.1 kOhms" "RES 0603_1608" 14.6,58.25 r180 top
R11 "22.6 kOhms" "RES 0603_1608" 18.7,56.8 r0 top
R12 "NC" "RES 0603_1608" 18.7,55.4 r0 top
R13 "5.1 kOhms" "RES 0603_1608" 5.25,27.75 r0 top
R14 "5.1 kOhms" "RES 0603_1608" 6,16 r0 top
R15 "100 kOhms" "RES 0603_1608" 24,20.5 r90 top
R16 "100 kOhms" "RES 0603_1608" 24,23.5 r270 top
R17 "12 kOhms" "RES 0603_1608" 14.85,25.4 r0 top
R18 "22 kOhms" "RES 0603_1608" 35,62 r270 top
R19 "100 kOhms" "RES 0603_1608" 33.85,69.05 r0 top
R20 "45.3 kOhms" "RES 0603_1608" 37.1,69.05 r180 top
R21 "45.3 kOhms" "RES 0603_1608" 36.75,58.25 r180 top
R22 "34.8 kOhms" "RES 0603_1608" 59.064,73.043 r0 top
R23 "78.7 kOhms" "RES 0603_1608" 36.7,59.7 r180 top
R24 "=Value" "RES 0603_1608" 37.1,67.55 r0 top
R25 "41.7 kOhms" "RES 0603_1608" 39.85,72.3 r180 top
R26 "100 kOhms" "RES 0603_1608" 28.5,75 r180 top
R27 "45.3 kOhms" "RES 0603_1608" 25.25,75 r0 top
R28 "=Value" "RES 0603_1608" 25,76.5 r180 top
R29 "41.7 kOhms" "RES 0603_1608" 22.75,71.75 r0 top
R30 "165 kOhms" "RES 0603_1608" 28.25,35.5 r180 top
R31 "100 kOhms" "RES 0603_1608" 26.75,51.5 r270 top
R32 "154 kOhms" "RES 0603_1608" 22.95,59.7 r90 top
R33 "73.2 kOhms" "RES 0603_1608" 30.75,51.5 r270 top
R34 "154 kOhms" "RES 0603_1608" 21.45,59.7 r90 top
R35 "154 kOhms" "RES 0603_1608" 19.95,59.7 r90 top
R36 "154 kOhms" "RES 0603_1608" 18.45,59.7 r90 top
R37 "178 kOhms" "RES 0603_1608" 36.25,35.5 r180 top
R38 "73.2 kOhms" "RES 0603_1608" 33.75,51.5 r270 top
R39 "150 mOhms" "STACKPOLE CSR0805" 56.18,56.25 r90 top
R40 "150 mOhms" "STACKPOLE CSR0805" 48.75,56.5 r90 top
R41 "2 kOhms" "RES 0603_1608" 43.25,29 r0 top
R42 "2 kOhms" "RES 0603_1608" 57.383,48.358 r0 top
R43 "2 kOhms" "RES 0603_1608" 49.25,48.25 r0 top
R44 "12 Ohms" "RES 0603_1608" 57.383,46.858 r0 top
R45 "12 Ohms" "RES 0603_1608" 49.25,46.75 r0 top
R46 "2 kOhms" "RES 0603_1608" 52.383,45.708 r90 top
R47 "2 kOhms" "RES 0603_1608" 57.383,45.358 r0 top
R48 "2 kOhms" "RES 0603_1608" 44.25,45.75 r90 top
R49 "2 kOhms" "RES 0603_1608" 49.25,45.25 r0 top
R50 "=Value" "RES 0603_1608" 97,72 r0 top
R51 "=Value" "RES 0603_1608" 97.75,53.75 r0 top
R52 "150 mOhms" "STACKPOLE CSR0805" 47.5,10.25 r270 top
R53 "150 mOhms" "STACKPOLE CSR0805" 56.75,10.5 r270 top
R54 "2 kOhms" "RES 0603_1608" 45.75,21 r180 top
R55 "2 kOhms" "RES 0603_1608" 55.25,21.5 r180 top
R56 "100 k" "RES 0603_1608" 21.25,48.75 r270 top
R57 "12 Ohms" "RES 0603_1608" 45.8,19.45 r180 top
R58 "12 Ohms" "RES 0603_1608" 55.25,20 r180 top
R59 "2 kOhms" "RES 0603_1608" 48,20.35 r270 top
R60 "2 kOhms" "RES 0603_1608" 45.8,17.95 r180 top
R61 "2 kOhms" "RES 0603_1608" 57.5,20.5 r270 top
R62 "2 kOhms" "RES 0603_1608" 55.25,18.5 r180 top
R63 "100 k" "RES 0603_1608" 14.3,52.5 r270 top
R64 "100 k" "RES 0603_1608" 12.75,52.5 r270 top
R65 "=Value" "RES 0603_1608" 98.75,38.75 r270 top
R66 "=Value" "RES 0603_1608" 98.25,21 r0 top
R67 "=Value" "RES 0603_1608" 43.35,36.5 r180 top
R68 "2 kOhms" "RES 0603_1608" 77,65.5 r0 top
R69 "2 kOhms" "RES 0603_1608" 77.25,49.25 r0 top
R70 "10 kOhms" "RES 0603_1608" 90.25,58.25 r0 top
R71 "2 kOhms" "RES 0603_1608" 86.75,63.7 r0 top
R72 "2 kOhms" "RES 0603_1608" 86.5,47.5 r0 top
R73 "11 kOhms" "RES 0603_1608" 98.25,57.75 r90 top
R74 "2 kOhms" "RES 0603_1608" 86.75,65.25 r0 top
R75 "2 kOhms" "RES 0603_1608" 86.5,49.25 r0 top
R76 "10 kOhms" "RES 0603_1608" 96.75,57.25 r90 top
R77 "=Value" "RES 0603_1608" 80.75,70 r0 top
R78 "=Value" "RES 0603_1608" 83.5,70 r180 top
R79 "10 kOhms" "RES 0603_1608" 90.25,45.5 r0 top
R80 "11 kOhms" "RES 0603_1608" 98.25,45.5 r90 top
R81 "10 kOhms" "RES 0603_1608" 96.75,45 r90 top
R82 "2 kOhms" "RES 0603_1608" 77.75,15.25 r0 top
R83 "2 kOhms" "RES 0603_1608" 77.5,32.75 r0 top
R84 "2 kOhms" "RES 0603_1608" 86.75,13.5 r0 top
R85 "2 kOhms" "RES 0603_1608" 86.5,31 r0 top
R86 "2 kOhms" "RES 0603_1608" 86.8,15 r0 top
R87 "2 kOhms" "RES 0603_1608" 86.5,32.6 r0 top
R88 "10 kOhms" "RES 0603_1608" 90.25,9.25 r0 top
R89 "11 kOhms" "RES 0603_1608" 98.25,9.15 r90 top
R90 "10 kOhms" "RES 0603_1608" 96.75,8.65 r90 top
R91 "10 kOhms" "RES 0603_1608" 90.25,24.5 r0 top
R92 "11 kOhms" "RES 0603_1608" 98.25,24.5 r90 top
R93 "10 kOhms" "RES 0603_1608" 96.75,24 r90 top
R94 "=Value" "RES 0603_1608" 74.5,35 r90 top
R95 "=Value" "RES 0603_1608" 76.5,36.5 r180 top
R96 "100 kOhms" "RES 0603_1608" 35.25,51.5 r90 top
R97 "133 Ohms" "RES 0603_1608" 51.7,2.1 r0 top
R98 "133 Ohms" "RES 0603_1608" 56.1,2.1 r0 top
R99 "133 Ohms" "RES 0603_1608" 47.5,2.1 r0 top
R100 "107 Ohms" "RES 0603_1608" 51.7,6.3 r0 top
R101 "107 Ohms" "RES 0603_1608" 56,6.3 r0 top
R102 "107 Ohms" "RES 0603_1608" 47.5,6.3 r0 top
R103 "100 kOhms" "RES 0603_1608" 55.4,74.6 r180 top
R104 "=Value" "RES 0603_1608" 59.856,75.364 r90 top
R105 "6.98 kOhms" "RES 0603_1608" 58.256,75.364 r270 top
R106 "1 MOhms" "RES 0603_1608" 71.5,8.5 r270 top
R107 "34.8 kOhms" "RES 0603_1608" 64.4,8.5 r270 top
R108 "34.8 kOhms" "RES 0603_1608" 68.9,8.5 r270 top
R109 "100 kOhms" "RES 0603_1608" 65.9,8.5 r90 top
R110 "100 kOhms" "RES 0603_1608" 67.4,8.5 r90 top
R111 "100 kOhms" "RES 0603_1608" 79.25,44 r180 top
R112 "100 kOhms" "RES 0603_1608" 76.65,44 r0 top
RST "430473035826" 430473035826 18,5 r0 top
U1 "ESP32-S3-WROOM-1-N8R2" XCVR_ESP32-S3-WROOM-1-N8R2 7,40 r90 top
U2 "USB2422T/MJ" FP-24-S4QFN-4x4B-0_5P-IPC_C 19.5,22 r0 top
U3 "LTM8078EY#PBF" FP-BGA-49-05-08-1518-IPC_C 30.75,59.75 r0 top
U4 "LTM8063EY#PBF" FP-BGA-28-05-08-1517-MFG 35.6,73.55 r180 top
U5 "TPS74601PDRVT" SON65P200X200X80-7N 55.79,72.718 r180 top
U6 "LTM8063EY#PBF" FP-BGA-28-05-08-1517-MFG 26.75,70.25 r0 top
U7 "LTM8049IY" FP-BGA-77-05-08-1964-MFG 32,45 r90 top
U8 "DS4424+" 21-0137_T1433+2_MXM 18.5,63.75 r90 top
U9 "AD74416HBCPZ" CP-64-15_ADI 52,31.25 r270 top
U10 "ADGS2414DBCCZ" CC-30-3_ADI 82,64.5 r0 top
U11 "ADGS2414DBCCZ" CC-30-3_ADI 82,48.167 r0 top
U12 "TPS16410DRCR" DRC0010J-IPC_A 94,58.75 r0 top
U13 "TXS0108EPWR" FP-PW0020A-IPC_C 73.75,56.25 r0 top
U14 "TPS16410DRCR" DRC0010J-IPC_A 94,46 r0 top
U15 "TXS0108EPWR" FP-PW0020A-IPC_C 73.5,23 r0 top
U16 "ADGS2414DBCCZ" CC-30-3_ADI 82,14.25 r0 top
U17 "ADGS2414DBCCZ" CC-30-3_ADI 82,31.833 r0 top
U18 "TPS16410DRCR" DRC0010J-IPC_A 94,9.75 r0 top
U19 "TPS16410DRCR" DRC0010J-IPC_A 94,25 r0 top
U20 "PCA9535AHF,128" FP-SOT994-1-MFG 73.5,40 r180 top
U21 "ADR4525BRZ" ADI-R-8_N 45.8,64.3 r270 top
U22 "HUSB238" DFN10 14.75,55.75 r270 top
U23 "ADGS2414DBCCZ" CC-30-3_ADI 66.4,13.5 r270 top
Y1 "ABM11W-24.0000MHZ-8-B1U-T3" FP-ABM11W-MFG 20,27.2 r0 top

## Footprints (in the part's own frame and the unit in brackets; to place one, negate y for a bottom-side part, rotate by r counter-clockwise, add the part's x,y. Pads: shape width x height; smd on the part's side, far side on the other; paste and mask are expansions set on the pad)
21-0137_T1433+2_MXM [mil]
  rect 28x8 smd paste+0 mask+0: 1(-59,47.24) 2(-59,31.5) 3(-59,15.75) 4(-59,0) 5(-59,-15.75) 6(-59,-31.5) 7(-59,-47.24) 8(59,-47.24) 9(59,-31.5) 10(59,-15.75) 11(59,0) 12(59,15.75) 13(59,31.5) 14(59,47.24)
  rect 67x94 smd paste+0 mask+0: 15(0,0)
  silkscreen extent -95,-66 66,66, body extent -61,-61 61,61, height 32
430473035826 [mm] "SMD Tact Switch, body 6x6mm"
  rect 1.7x1.4 smd: A1(-3.35,2) A2(3.35,2) B1(-3.35,-2) B2(3.35,-2)
  silkscreen extent -3.2,-3.2 3.2,3.2, body extent -3.6,-3.1 3.6,3.1, height 3.5
691382010005 [mm] "Horizontal PCB Header, pitch 2.5mm, 05p"
  rrect50% 2x2 hole 1.4: 1(-5,3.95)
  round 2 hole 1.4: 2(-2.5,3.95) 3(0,3.95) 4(2.5,3.95) 5(5,3.95)
  silkscreen extent -7.25,-5.05 7.25,5.05, body extent -7.25,-5.05 7.25,5.05, height 8.15
ADI-R-8_N [mm] "SOIC, 8-Leads, Body 4.9x3.9mm, Pitch 1.27mm, IPC Medium Density"
  oval 2.2x0.6 smd: 1(-2.4,1.905) 2(-2.4,0.635) 3(-2.4,-0.635) 4(-2.4,-1.905) 5(2.4,-1.905) 6(2.4,-0.635) 7(2.4,0.635) 8(2.4,1.905)
  silkscreen extent -2.52,-2.5 0.9,2.88, body extent -2,-2.5 2,2.5, height 1.75
"CAP 0603_1608" [mm] "Chip Capacitor, 2-Leads, Body 1.60x0.80mm, IPC Medium Density"
  rect 0.9x1 smd: 1(-0.675,0) 2(0.675,0)
  silkscreen extent -1.4,-0.7 1.4,0.7, body extent -0.8,-0.41 0.8,0.41, height 0.82
"CAP 1210_3225 - 1MM" [mm] "Chip Capacitor, 2-Leads, Body 3.20x2.50mm, IPC Medium Density"
  rect 1.3x2.7 smd: 1(-1.4,0) 2(1.4,0)
  silkscreen extent -2.37,-1.63 2.37,1.63, body extent -1.6,-1.25 1.6,1.25, height 1
"CAP 1210_3225 - 2.8MM" [mm] "Chip Capacitor, 2-Leads, Body 3.20x2.50mm, IPC Medium Density"
  rect 1.3x2.7 smd: 1(-1.4,0) 2(1.4,0)
  silkscreen extent -2.37,-1.63 2.37,1.63, body extent -1.6,-1.25 1.6,1.25, height 2.8
CC-30-3_ADI [mm]
  rect 0.706x0.28 smd paste+0 mask+0: 1(-1.991,2) 2(-1.991,1.5) 3(-1.991,1) 4(-1.991,0.5) 5(-1.991,0) 6(-1.991,-0.5) 7(-1.991,-1) 8(-1.991,-1.5) 9(-1.991,-2) 16(1.991,-2) 17(1.991,-1.5) 18(1.991,-1) 19(1.991,-0.5) 20(1.991,0) 21(1.991,0.5) 22(1.991,1) 23(1.991,1.5) 24(1.991,2)
  rect 0.28x0.706 smd paste+0 mask+0: 10(-1.25,-2.499) 11(-0.75,-2.499) 12(-0.25,-2.499) 13(0.25,-2.499) 14(0.75,-2.499) 15(1.25,-2.499) 25(1.25,2.499) 26(0.75,2.499) 27(0.25,2.499) 28(-0.25,2.499) 29(-0.75,2.499) 30(-1.25,2.499)
  rect 2.388x2.591 smd paste+0 mask+0: 31(0,0)
  silkscreen extent -2.17,-3.36 2.85,3.36, body extent -2.04,-2.55 2.04,2.55, height 1.73
CP-64-15_ADI [mil]
  rect 30x10 smd paste+0 mask+0: 1(-176,147.64) 2(-176,127.95) 3(-176,108.27) 4(-176,88.58) 5(-176,68.9) 6(-176,49.21) 7(-176,29.53) 8(-176,9.84) 9(-176,-9.84) 10(-176,-29.53) 11(-176,-49.21) 12(-176,-68.9) 13(-176,-88.58) 14(-176,-108.27) 15(-176,-127.95) 16(-176,-147.64) 33(176,-147.64) 34(176,-127.95) 35(176,-108.27) 36(176,-88.58) 37(176,-68.9) 38(176,-49.21) 39(176,-29.53) 40(176,-9.84) 41(176,9.84) 42(176,29.53) 43(176,49.21) 44(176,68.9) 45(176,88.58) 46(176,108.27) 47(176,127.95) 48(176,147.64)
  rect 10x30 smd paste+0 mask+0: 17(-147.64,-176) 18(-127.95,-176) 19(-108.27,-176) 20(-88.58,-176) 21(-68.9,-176) 22(-49.21,-176) 23(-29.53,-176) 24(-9.84,-176) 25(9.84,-176) 26(29.53,-176) 27(49.21,-176) 28(68.9,-176) 29(88.58,-176) 30(108.27,-176) 31(127.95,-176) 32(147.64,-176) 49(147.64,176) 50(127.95,176) 51(108.27,176) 52(88.58,176) 53(68.9,176) 54(49.21,176) 55(29.53,176) 56(9.84,176) 57(-9.84,176) 58(-29.53,176) 59(-49.21,176) 60(-68.9,176) 61(-88.58,176) 62(-108.27,176) 63(-127.95,176) 64(-147.64,176)
  rect 303x303 smd paste+0 mask+0: 65(0,0)
  silkscreen extent -211,-211 211,211, body extent -179,-179 179,179, height 30
DFN10 [mm]
  rect 0.28x0.665 smd paste+0 mask+0.05: 1(-1,-1.407) 2(-0.5,-1.407) 3(0,-1.407) 4(0.5,-1.407) 5(1,-1.407) 6(1,1.407) 7(0.5,1.407) 8(0,1.407) 9(-0.5,1.407) 10(-1,1.407)
  rect 2.5x1.5 smd paste+0 mask+0.05: 11(0,0)
  silkscreen extent -1.58,-2.11 1.58,1.58, body extent -1.55,-1.57 1.55,1.55, height 0.8
DRC0010J-IPC_A [mm]
  rect 0.931x0.239 smd paste+0 mask+0: 1(-1.491,1) 2(-1.491,0.5) 3(-1.491,0) 4(-1.491,-0.5) 5(-1.491,-1) 6(1.491,-1) 7(1.491,-0.5) 8(1.491,0) 9(1.491,0.5) 10(1.491,1)
  rect 1.75x2.5 smd paste-1.237 mask+0: 11(0,0)
  silkscreen extent -2.88,-1.5 1.5,1.5, body extent -1.5,-1.5 1.5,1.5, height 1
FP-24-S4QFN-4x4B-0_5P-IPC_C [mm]
  rect 0.761x0.239 smd paste+0 mask+0: 1(-1.876,1.25)
  rrect100% 0.761x0.239 smd paste+0 mask+0: 2(-1.876,0.75) 3(-1.876,0.25) 4(-1.876,-0.25) 5(-1.876,-0.75) 6(-1.876,-1.25) 13(1.876,-1.25) 14(1.876,-0.75) 15(1.876,-0.25) 16(1.876,0.25) 17(1.876,0.75) 18(1.876,1.25)
  rrect100% 0.239x0.761 smd paste+0 mask+0: 7(-1.25,-1.876) 8(-0.75,-1.876) 9(-0.25,-1.876) 10(0.25,-1.876) 11(0.75,-1.876) 12(1.25,-1.876) 19(1.25,1.876) 20(0.75,1.876) 21(0.25,1.876) 22(-0.25,1.876) 23(-0.75,1.876) 24(-1.25,1.876)
  rect 2.6x2.6 smd paste-1000 mask+0: 25(0,0)
  silkscreen extent -2.78,-2 2,2, body extent -2.36,-2.36 2.36,2.36, height 0.25
FP-403D-MFG [mm]
  rect 2x2 smd paste+0 mask+0: 1(-2,0) 2(2,0)
  silkscreen extent -4.3,-1.46 2.28,1.46, body extent -3.1,-1.56 3.1,1.56, height 0.25
FP-502-MFG [mm]
  rect 0.48x0.4 smd paste+0 mask+0: 1(-0.66,0) 2(0.66,0)
  silkscreen extent -1.57,-0.45 0.05,0.45, body extent -1,-0.55 1,0.55, height 0.25
FP-ABM11W-MFG [mm]
  rect 0.875x0.775 smd paste+0 mask+0: 1(-0.637,-0.487) 2(0.637,-0.487) 3(0.637,0.487) 4(-0.637,0.487)
  silkscreen extent -1.77,-1.28 1.05,1.28, body extent -1.17,-0.97 1.17,0.97, height 0.25
FP-BGA-28-05-08-1517-MFG [mm]
  round 0.4 smd paste+0 mask+0: A1(-1.2,2.4) A2(-0.4,2.4) A3(0.4,2.4) A4(1.2,2.4) B1(-1.2,1.6) B2(-0.4,1.6) B3(0.4,1.6) B4(1.2,1.6) C1(-1.2,0.8) C2(-0.4,0.8) C3(0.4,0.8) C4(1.2,0.8) D1(-1.2,0) D2(-0.4,0) D3(0.4,0) D4(1.2,0) E1(-1.2,-0.8) E2(-0.4,-0.8) E3(0.4,-0.8) E4(1.2,-0.8) F1(-1.2,-1.6) F2(-0.4,-1.6) F3(0.4,-1.6) F4(1.2,-1.6) G1(-1.2,-2.4) G2(-0.4,-2.4) G3(0.4,-2.4) G4(1.2,-2.4)
  silkscreen extent -3.15,-3.2 2.07,3.2, body extent -2.58,-3.7 2.58,3.7, height 0.25
FP-BGA-49-05-08-1518-IPC_C [mm]
  round 0.4 smd paste+0 mask+0: A1(-2.4,2.4) A2(-1.6,2.4) A3(-0.8,2.4) A4(0,2.4) A5(0.8,2.4) A6(1.6,2.4) A7(2.4,2.4) B1(-2.4,1.6) B2(-1.6,1.6) B3(-0.8,1.6) B4(0,1.6) B5(0.8,1.6) B6(1.6,1.6) B7(2.4,1.6) C1(-2.4,0.8) C2(-1.6,0.8) C3(-0.8,0.8) C4(0,0.8) C5(0.8,0.8) C6(1.6,0.8) C7(2.4,0.8) D1(-2.4,0) D2(-1.6,0) D3(-0.8,0) D4(0,0) D5(0.8,0) D6(1.6,0) D7(2.4,0) E1(-2.4,-0.8) E2(-1.6,-0.8) E3(-0.8,-0.8) E4(0,-0.8) E5(0.8,-0.8) E6(1.6,-0.8) E7(2.4,-0.8) F1(-2.4,-1.6) F2(-1.6,-1.6) F3(-0.8,-1.6) F4(0,-1.6) F5(0.8,-1.6) F6(1.6,-1.6) F7(2.4,-1.6) G1(-2.4,-2.4) G2(-1.6,-2.4) G3(-0.8,-2.4) G4(0,-2.4) G5(0.8,-2.4) G6(1.6,-2.4) G7(2.4,-2.4)
  silkscreen extent -3.62,-3.13 3.13,3.13, body extent -3.22,-3.22 3.22,3.22, height 0.25
FP-BGA-77-05-08-1964-MFG [mm]
  round 0.63 smd paste+0 mask+0: A1(-3.81,6.35) A2(-2.54,6.35) A3(-1.27,6.35) A4(0,6.35) A5(1.27,6.35) A6(2.54,6.35) A7(3.81,6.35) B1(-3.81,5.08) B2(-2.54,5.08) B3(-1.27,5.08) B4(0,5.08) B5(1.27,5.08) B6(2.54,5.08) B7(3.81,5.08) C1(-3.81,3.81) C2(-2.54,3.81) C3(-1.27,3.81) C4(0,3.81) C5(1.27,3.81) C6(2.54,3.81) C7(3.81,3.81) D1(-3.81,2.54) D2(-2.54,2.54) D3(-1.27,2.54) D4(0,2.54) D5(1.27,2.54) D6(2.54,2.54) D7(3.81,2.54) E1(-3.81,1.27) E2(-2.54,1.27) E3(-1.27,1.27) E4(0,1.27) E5(1.27,1.27) E6(2.54,1.27) E7(3.81,1.27) F1(-3.81,0) F2(-2.54,0) F3(-1.27,0) F4(0,0) F5(1.27,0) F6(2.54,0) F7(3.81,0) G1(-3.81,-1.27) G2(-2.54,-1.27) G3(-1.27,-1.27) G4(0,-1.27) G5(1.27,-1.27) G6(2.54,-1.27) G7(3.81,-1.27) H1(-3.81,-2.54) H2(-2.54,-2.54) H3(-1.27,-2.54) H4(0,-2.54) H5(1.27,-2.54) H6(2.54,-2.54) H7(3.81,-2.54) J1(-3.81,-3.81) J2(-2.54,-3.81) J3(-1.27,-3.81) J4(0,-3.81) J5(1.27,-3.81) J6(2.54,-3.81) J7(3.81,-3.81) K1(-3.81,-5.08) K2(-2.54,-5.08) K3(-1.27,-5.08) K4(0,-5.08) K5(1.27,-5.08) K6(2.54,-5.08) K7(3.81,-5.08) L1(-3.81,-6.35) L2(-2.54,-6.35) L3(-1.27,-6.35) L4(0,-6.35) L5(1.27,-6.35) L6(2.54,-6.35) L7(3.81,-6.35)
  silkscreen extent -5.7,-7.57 4.57,7.57, body extent -5.07,-8.08 5.07,8.08, height 0.25
FP-DFN3x3A_8L_EP1_P-MFG [mm]
  rect 0.35x0.5 smd paste+0 mask+0: 1(-0.975,-1.4) 2(-0.325,-1.4) 3(0.325,-1.4) 4(0.975,-1.4)
  round 1.769 smd paste+0 mask+0: 5-6-7-8(-0.038,0.367)
  Top Layer region: -1.225,-0.63 -1.225,-0.215 -1.605,-0.215 -1.605,0.215 -1.225,0.215 -1.225,1.35 -1.175,1.35 -1.175,1.65 -0.775,1.65 -0.775,1.35 -0.525,1.35 -0.525,1.65 -0.125,1.65 -0.125,1.35 0.125,1.35 0.125,1.65 0.525,1.65 0.525,1.35 0.775,1.35 0.775,1.65 1.175,1.65 1.175,1.35 1.225,1.35 1.225,0.215 1.605,0.215 1.605,-0.215 1.225,-0.215 1.225,-0.63
  silkscreen extent -1.9,-2.35 1.9,1.55, body extent -1.71,-1.75 1.71,1.75, height 0.25
FP-DRL0006A-MFG [mm]
  rrect33% 0.67x0.3 smd paste+0 mask+0: 1(-0.74,0.5) 2(-0.74,0) 3(-0.74,-0.5) 4(0.74,-0.5) 5(0.74,0) 6(0.74,0.5)
  silkscreen extent -1.9,-1.05 0.65,1.05, body extent -1.17,-1.1 1.17,1.1, height 0.25
FP-HSMF-C165-MFG [mm]
  rect 0.7x0.4 smd paste+0 mask+0: 1(-0.65,0.35) 2(-0.65,-0.35) 3(0.65,0.35) 4(0.65,-0.35)
  silkscreen extent -1.68,-0.92 0.85,0.92, body extent -1.1,-0.65 1.1,0.65, height 0.25
FP-PW0020A-IPC_C [mm]
  rect 1.355x0.341 smd paste+0 mask+0: 1(-2.775,2.925)
  rrect100% 1.355x0.341 smd paste+0 mask+0: 2(-2.775,2.275) 3(-2.775,1.625) 4(-2.775,0.975) 5(-2.775,0.325) 6(-2.775,-0.325) 7(-2.775,-0.975) 8(-2.775,-1.625) 9(-2.775,-2.275) 10(-2.775,-2.925) 11(2.775,-2.925) 12(2.775,-2.275) 13(2.775,-1.625) 14(2.775,-0.975) 15(2.775,-0.325) 16(2.775,0.325) 17(2.775,0.975) 18(2.775,1.625) 19(2.775,2.275) 20(2.775,2.925)
  silkscreen extent -4.15,-3.25 1.6,3.25, body extent -3.55,-3.35 3.55,3.35, height 0.25
FP-S16-2667-SINGLE-MFG [mil]
  rect 39x16 smd paste+0 mask+0: 1(-56.5,39) 2(-56.5,13) 3(-56.5,-13) 4(-56.5,-39)
  round 59.4 smd paste+0 mask+0: 5-6-7-8(21,8)
  Top Layer region: -12,44 46,44 46,47 76,47 76,31 56,31 56,21 76,21 76,5 56,5 56,-5 76,-5 76,-21 56,-21 56,-31 76,-31 76,-47 46,-47 46,-44 -12,-44
  silkscreen extent -103,-62 62,62, body extent -80,-71 80,71, height 10
FP-SOT994-1-MFG [mm]
  rrect100% 0.85x0.27 smd paste+0 mask-1000: 1(-1.975,1.25) 2(-1.975,0.75) 3(-1.975,0.25) 4(-1.975,-0.25) 5(-1.975,-0.75) 6(-1.975,-1.25) 13(1.975,-1.25) 14(1.975,-0.75) 15(1.975,-0.25) 16(1.975,0.25) 17(1.975,0.75) 18(1.975,1.25)
  rrect100% 0.27x0.85 smd paste+0 mask-1000: 7(-1.25,-1.975) 8(-0.75,-1.975) 9(-0.25,-1.975) 10(0.25,-1.975) 11(0.75,-1.975) 12(1.25,-1.975) 19(1.25,1.975) 20(0.75,1.975) 21(0.25,1.975) 22(-0.25,1.975) 23(-0.75,1.975) 24(-1.25,1.975)
  rect 2.1x2.1 smd paste-1000 mask-1000: 25(0,0)
  silkscreen extent -3.2,-2.05 2.05,2.05, body extent -2.5,-2.5 2.5,2.5, height 0.25
FP-USB4085-GF-A-MFG [mm]
  rrect100% 0.9x2.4 hole 2.1 slot 0.6 at 0 deg paste-2539.97 mask+0: 1(-4.325,3.045) 2(4.325,3.045)
  rrect100% 0.9x1.7 hole 1.4 slot 0.6 at 0 deg paste-2539.97 mask+0: 3(-4.325,-0.335) 4(4.325,-0.335)
  round 0.65 hole 0.4 paste-2539.97 mask+0: A1(-2.975,4.025) A4(-2.125,4.025) A5(-1.275,4.025) A6(-0.425,4.025) A7(0.425,4.025) A8(1.275,4.025) A9(2.125,4.025) A12(2.975,4.025) B1(2.975,2.675) B4(2.125,2.675) B5(1.275,2.675) B6(0.425,2.675) B7(-0.425,2.675) B8(-1.275,2.675) B9(-2.125,2.675) B12(-2.975,2.675)
  silkscreen extent -4.57,0.89 4.57,5.37, body extent -4.87,-4.83 4.87,4.83, height 0.25
FP-USB4125-GF-A-0190-MFG [mm]
  rrect100% 1.1x1.7 hole 1.2 slot 0.6 at 0 deg paste-2539.97 mask+0: 1(-4.32,3) 2(4.32,3) 3(-4.32,-0.8) 4(4.32,-0.8)
  rect 0.7x1.2 smd paste+0 mask+0: A5(-0.5,3) B5(0.5,3)
  rect 0.76x1.2 smd paste+0 mask+0: A9(1.52,3) B9(-1.52,3)
  rect 0.8x1.2 smd paste+0 mask+0: A12(2.75,3) B12(-2.75,3)
  silkscreen extent -4.59,0.43 4.59,4.38, body extent -4.97,-3.57 4.97,3.95, height 0.25
"HARWIN M20-7830445" [mm] "2.54mm DIL PC TAIL PIN HEADER ASSEMBLY"
  round 2 hole 1.1: 1(-1.27,3.81) 2(-1.27,1.27) 3(-1.27,-1.27) 4(-1.27,-3.81) 5(1.27,-3.81) 6(1.27,-1.27) 7(1.27,1.27) 8(1.27,3.81)
  silkscreen extent -2.5,-5.23 2.5,5.27, body extent -2.52,-5.28 2.52,5.28, height 8.5
LED_XL-2020RGBC-WS2812B [mm]
  rect 0.85x0.65 smd: 1(-0.675,0.65) 2(-0.675,-0.65) 3(0.675,-0.65) 4(0.675,0.65)
  silkscreen extent -1.85,0.55 -1.65,0.75, body extent -1.1,-1.02 1.1,0.98, height 0.84
"RES 0603_1608" [mm] "Chip Resistor, 2-Leads, Body 1.60x0.80mm, IPC Medium Density"
  rect 0.85x0.95 smd: 1(-0.65,0) 2(0.65,0)
  silkscreen extent -1.27,-0.7 1.27,0.7, body extent -0.8,-0.4 0.8,0.4, height 0.45
SON65P200X200X80-7N [mm]
  rect 0.66x0.32 smd: 1(-1.025,0.65) 2(-1.025,0) 3(-1.025,-0.65) 4(1.025,-0.65) 5(1.025,0) 6(1.025,0.65)
  rect 1x1.6 smd paste-2: 7(0,0)
  silkscreen extent -2.01,-1.13 1,1.13, body extent -1,-1 1,1, height 0.8
"STACKPOLE CSR0805" [mm] "Chip Resistor, 2-Leads, Body 2.00x1.25mm, IPC Medium Density"
  rect 1x1.35 smd: 1(-1,0) 2(1,0)
  silkscreen extent -1.7,-0.9 1.7,0.9, body extent -1.05,-0.63 1.05,0.62, height 0.55
XCVR_ESP32-S3-WROOM-1-N8R2 [mm]
  rect 1.5x0.9 smd: 1(-8.75,5.26) 2(-8.75,3.99) 3(-8.75,2.72) 4(-8.75,1.45) 5(-8.75,0.18) 6(-8.75,-1.09) 7(-8.75,-2.36) 8(-8.75,-3.63) 9(-8.75,-4.9) 10(-8.75,-6.17) 11(-8.75,-7.44) 12(-8.75,-8.71) 13(-8.75,-9.98) 14(-8.75,-11.25) 27(8.75,-11.25) 28(8.75,-9.98) 29(8.75,-8.71) 30(8.75,-7.44) 31(8.75,-6.17) 32(8.75,-4.9) 33(8.75,-3.63) 34(8.75,-2.36) 35(8.75,-1.09) 36(8.75,0.18) 37(8.75,1.45) 38(8.75,2.72) 39(8.75,3.99) 40(8.75,5.26)
  rect 0.9x1.5 smd: 15(-6.985,-12.5) 16(-5.715,-12.5) 17(-4.445,-12.5) 18(-3.175,-12.5) 19(-1.905,-12.5) 20(-0.635,-12.5) 21(0.635,-12.5) 22(1.905,-12.5) 23(3.175,-12.5) 24(4.445,-12.5) 25(5.715,-12.5) 26(6.985,-12.5)
  rect 0.9x0.9 smd: 41_1(-1.5,-2.46) 41_2(-2.9,-2.46) 41_3(-0.1,-2.46) 41_4(-2.9,-3.86) 41_5(-1.5,-3.86) 41_6(-0.1,-3.86) 41_7(-2.9,-1.06) 41_8(-1.5,-1.06) 41_9(-0.1,-1.06)
  Keep-Out Layer region: 9,6.75 -9,6.75 -9,12.75 9,12.75
  Keep-Out Layer region: 9,6.75 -9,6.75 -9,12.75 9,12.75
  silkscreen extent -10.3,-12.75 9,12.75, body extent -9,-12.75 9,12.75, height 3.25

## Part data
BOOT RST: library part CMP-1455-00006-5, "Switch Tactile Spst-no 0.05A 12V", Current Rating=50mA, Insulation Resistance=100MΩ, Max Operating Temperature=85°C, Min Operating Temperature=-40°C, Voltage Rating=12V, Actuator Material="Liquid Crystal Polymer, Polymer", Contact Plating=Silver, Height=3.5mm, Illumination Type=Non-Illuminated, Mechanical Life=500kcycles, Mount="Surface Mount", packaging="Tape and Reel", RoHS=Compliant, Switch Function=Off-Mom, Switch Travel=250µm, Throw Configuration=SPST
C1 C2 C4 C5 C8 C13 C21 C23 C25 C30 C59 C64 C69 C72 C75 C77 C79 C80: library part C1608X5R1H105K080AB, "CAP CER 1UF 50V X5R 0603", Device Package="0603 (1608 Metric)", manufacturer="TDK Corporation", Operating Temperature="-55°C ~ 85°C", Supplier Part Number 1=445-7468-1-ND, Temperature Coefficient=X5R, Tolerance=±10%, Voltage - Rated=50V, Applications="General Purpose", Capacitance="1 µF", componentlink1description=Datasheet, componentlink1url=https://product.tdk.com/info/en/catalog/datasheets/mlcc_commercial_general_en.pdf?ref_disty=digikey, componentlink2description="DigiKey Link", componentlink2url=https://www.digikey.com/en/products/detail/tdk-corporation/C1608X5R1H105K080AB/2732903, Features="Low ESL", lastupdated="09/02/2024 20:10:02", Lifecycle Status=Active, Minimum Order=1, Mounting Type="Surface Mount, MLCC", Package / Case="0603 (1608 Metric)", packaging=TapeAndReel, Part Number=C1608X5R1H105K080AB, Part Status=Active, partid=36337, price=0.02, series=C, Size / Dimension="0.063\" L x 0.031\" W (1.60mm x 0.80mm)", Supplier 1=DigiKey, Thickness (Max)="0.035\" (0.90mm)"
C3 C12 C17: library part CC0603MRX6S5BB226, "CAP CER 22UF 6.3V X6S 0603", Device Package="0603 (1608 Metric)", manufacturer=Yageo, Operating Temperature="-55°C ~ 105°C", Supplier Part Number 1=13-CC0603MRX6S5BB226CT-ND, Temperature Coefficient=X6S, Tolerance=±20%, Voltage - Rated=6.3V, Applications="General Purpose", Capacitance="22 µF", componentlink1description=Datasheet, componentlink1url=https://www.yageo.com/upload/media/product/productsearch/datasheet/mlcc/UPY-GPHC_X6S_4V-to-50V_5.pdf, componentlink2description="DigiKey Link", componentlink2url=https://www.digikey.com/en/products/detail/yageo/CC0603MRX6S5BB226/12698890, lastupdated="09/02/2024 20:09:49", Lifecycle Status=Active, Minimum Order=1, Mounting Type="Surface Mount, MLCC", Package / Case="0603 (1608 Metric)", packaging=TapeAndReel, Part Number=CC0603MRX6S5BB226, Part Status=Active, partid=45941, price=0.03, series=CC, Size / Dimension="0.063\" L x 0.031\" W (1.60mm x 0.80mm)", Supplier 1=DigiKey, Thickness (Max)="0.039\" (1.00mm)"
C6 C7 C11 C15 C16 C33 C35 C60 C61 C63 C65 C66 C67 C70 C73 C76: library part CGA3E2X7R1H104M080AE, "CAP CER 0.1UF 50V X7R 0603", Device Package="0603 (1608 Metric)", manufacturer="TDK Corporation", Operating Temperature="-55°C ~ 125°C", Ratings=AEC-Q200, Supplier Part Number 1=445-15958-1-ND, Temperature Coefficient=X7R, Tolerance=±20%, Voltage - Rated=50V, Applications="Automotive, Boardflex Sensitive", Capacitance="0.1 µF", componentlink1description=Datasheet, componentlink1url=https://product.tdk.com/info/en/catalog/datasheets/mlcc_automotive_soft_en.pdf?ref_disty=digikey, componentlink2description="DigiKey Link", componentlink2url=https://www.digikey.com/en/products/detail/tdk-corporation/CGA3E2X7R1H104M080AE/4490595, Features="Soft Termination", lastupdated="09/02/2024 20:10:15", Lifecycle Status=Active, Minimum Order=1, Mounting Type="Surface Mount, MLCC", Package / Case="0603 (1608 Metric)", packaging=TapeAndReel, Part Number=CGA3E2X7R1H104M080AE, Part Status=Active, partid=13634, price=0.03, series=CGA, Size / Dimension="0.063\" L x 0.031\" W (1.60mm x 0.80mm)", Supplier 1=DigiKey, Thickness (Max)="0.037\" (0.95mm)"
C9 C10: library part CGA3E2C0G1H080D080AA, "CAP CER 8PF 50V C0G 0603", Device Package="0603 (1608 Metric)", manufacturer="TDK Corporation", Operating Temperature="-55°C ~ 125°C", Ratings=AEC-Q200, Supplier Part Number 1=445-5626-1-ND, Temperature Coefficient="C0G, NP0", Tolerance=±0.5pF, Voltage - Rated=50V, Applications=Automotive, Capacitance="8 pF", componentlink1description=Datasheet, componentlink1url=https://product.tdk.com/info/en/catalog/datasheets/mlcc_automotive_general_en.pdf?ref_disty=digikey, componentlink2description="DigiKey Link", componentlink2url=https://www.digikey.com/en/products/detail/tdk-corporation/CGA3E2C0G1H080D080AA/2443104, lastupdated="09/02/2024 20:10:12", Lifecycle Status=Active, Minimum Order=1, Mounting Type="Surface Mount, MLCC", Package / Case="0603 (1608 Metric)", packaging=TapeAndReel, Part Number=CGA3E2C0G1H080D080AA, Part Status=Active, partid=15270, price=0.01, series=CGA, Size / Dimension="0.063\" L x 0.031\" W (1.60mm x 0.80mm)", Supplier 1=DigiKey, Thickness (Max)="0.035\" (0.90mm)"
C14 C28 C29: library part GRM188R61E475ME11J, "CAP CER 4.7UF 25V X5R 0603", Device Package="0603 (1608 Metric)", manufacturer="Murata Electronics", Operating Temperature="-55°C ~ 85°C", Supplier Part Number 1=490-GRM188R61E475ME11JCT-ND, Temperature Coefficient=X5R, Tolerance=±20%, Voltage - Rated=25V, Applications="General Purpose", Capacitance="4.7 µF", componentlink2description="DigiKey Link", componentlink2url=https://www.digikey.com/en/products/detail/murata-electronics/GRM188R61E475ME11J/10703204, lastupdated="09/02/2024 20:09:44", Lifecycle Status=Active, Minimum Order=1, Mounting Type="Surface Mount, MLCC", Package / Case="0603 (1608 Metric)", packaging=TapeAndReel, Part Number=GRM188R61E475ME11J, Part Status=Active, partid=47573, price=0.03, series=GRM, Size / Dimension="0.063\" L x 0.032\" W (1.60mm x 0.80mm)", Supplier 1=DigiKey, Thickness (Max)="0.037\" (0.95mm)"
C18 C26 C32: library part 12103C226KAT2A, "CAP CER 22UF 25V X7R 1210", Device Package="1210 (3225 Metric)", manufacturer="AVX Corporation", Operating Temperature="-55°C ~ 125°C", Supplier Part Number 1=478-9964-1-ND, Temperature Coefficient=X7R, Tolerance=±10%, Voltage - Rated=25V, Applications="General Purpose", Capacitance=22µF, componentlink1description=Datasheet, componentlink1url=http://datasheets.avx.com/X7RDielectric.pdf, componentlink2description="DigiKey Link", componentlink2url=http://digikey.com/product-detail/en/avx-corporation/12103C226KAT2A/478-9964-1-ND/6149088, lastupdated="02/09/2020 01:10:48", Lifecycle Status=Active, Minimum Order=1, Mounting Type="Surface Mount, MLCC", Package / Case="1210 (3225 Metric)", packaging=TapeAndReel, Part Number=12103C226KAT2A, Part Status=Active, partid=24236, price=0.91, series=-, Size / Dimension="0.130\" L x 0.098\" W (3.30mm x 2.50mm)", Supplier 1=DigiKey, Thickness (Max)="0.110\" (2.79mm)"
C19 C20 C27: library part C0603X103K5RAC7867, "CAP CER 10000PF 50V X7R 0603", Device Package="0603 (1608 Metric)", manufacturer=KEMET, Operating Temperature="-55°C ~ 125°C", Supplier Part Number 1=399-C0603X103K5RAC7867CT-ND, Temperature Coefficient=X7R, Tolerance=±10%, Voltage - Rated=50V, Applications="Boardflex Sensitive", Capacitance="10000 pF", componentlink1description=Datasheet, componentlink1url=https://api.kemet.com/component-edge/download/datasheet/C0603X103K5RACTU.pdf, componentlink2description="DigiKey Link", componentlink2url=https://www.digikey.com/en/products/detail/kemet/C0603X103K5RAC7867/1842288, Features="Soft Termination", lastupdated="09/02/2024 20:09:59", Lifecycle Status=Active, Minimum Order=1, Mounting Type="Surface Mount, MLCC", Package / Case="0603 (1608 Metric)", packaging=TapeAndReel, Part Number=C0603X103K5RAC7867, Part Status=Active, partid=35676, price=0.06, series="SMD Comm X7R Flex", Size / Dimension="0.063\" L x 0.031\" W (1.60mm x 0.80mm)", Supplier 1=DigiKey, Thickness (Max)="0.034\" (0.87mm)"
C22 C24 C31: library part CC0603GRNPO8BN102, "CAP CER 1000PF 25V C0G/NPO 0603", Device Package="0603 (1608 Metric)", manufacturer=Yageo, Operating Temperature="-55°C ~ 125°C", Supplier Part Number 1=311-3914-1-ND, Temperature Coefficient="C0G, NP0", Tolerance=±2%, Voltage - Rated=25V, Applications="General Purpose", Capacitance="1000 pF", componentlink1description=Datasheet, componentlink1url=https://www.yageo.com/upload/media/product/productsearch/datasheet/mlcc/UPY-GP_NP0_16V-to-50V_17.pdf, componentlink2description="DigiKey Link", componentlink2url=https://www.digikey.com/en/products/detail/yageo/CC0603GRNPO8BN102/5883535, lastupdated="09/02/2024 20:10:07", Lifecycle Status=Active, Minimum Order=1, Mounting Type="Surface Mount, MLCC", Package / Case="0603 (1608 Metric)", packaging=TapeAndReel, Part Number=CC0603GRNPO8BN102, Part Status=Active, partid=17388, price=0.02, series=CC, Size / Dimension="0.063\" L x 0.031\" W (1.60mm x 0.80mm)", Supplier 1=DigiKey, Thickness (Max)="0.035\" (0.90mm)"
C34: library part KGM32LR51E476MU, "CAP CER 47UF 25V X5R 1210", Device Package="1210 (3225 Metric)", manufacturer="KYOCERA AVX", Operating Temperature="-55°C ~ 85°C", Supplier Part Number 1=478-KGM32LR51E476MUCT-ND, Temperature Coefficient=X5R, Tolerance=±20%, Voltage - Rated=25V, Applications="General Purpose", Capacitance="47 µF", componentlink2description="DigiKey Link", componentlink2url=https://www.digikey.com/en/products/detail/kyocera-avx/KGM32LR51E476MU/11231511, lastupdated="04/06/2024 19:20:46", Lifecycle Status=Active, Minimum Order=1, Mounting Type="Surface Mount, MLCC", Package / Case="1210 (3225 Metric)", packaging=TapeAndReel, Part Number=KGM32LR51E476MU, Part Status=Active, partid=51635, price=1.07, series="KGM - X5R", Size / Dimension="0.126\" L x 0.098\" W (3.20mm x 2.50mm)", Supplier 1=DigiKey, Thickness (Max)="0.110\" (2.80mm)"
C36 C38 C40 C42 C58: library part KGM15CS61E106MT, "CAP CER 10UF 25V X6S 0603", Device Package="0603 (1608 Metric)", manufacturer="KYOCERA AVX", Operating Temperature="-55°C ~ 105°C", Supplier Part Number 1=478-KGM15CS61E106MTCT-ND, Temperature Coefficient=X6S, Tolerance=±20%, Voltage - Rated=25V, Applications="General Purpose", Capacitance="10 µF", componentlink1description=Datasheet, componentlink1url=https://datasheets.kyocera-avx.com/x6s-dielectric.pdf, componentlink2description="DigiKey Link", componentlink2url=https://www.digikey.com/en/products/detail/kyocera-avx/KGM15CS61E106MT/16602925, lastupdated="09/02/2024 20:09:18", Lifecycle Status=Active, Minimum Order=1, Mounting Type="Surface Mount, MLCC", Package / Case="0603 (1608 Metric)", packaging=TapeAndReel, Part Number=KGM15CS61E106MT, Part Status=Active, partid=52144, price=0.06, series="KGM - X6S", Size / Dimension="0.063\" L x 0.031\" W (1.60mm x 0.80mm)", Supplier 1=DigiKey, Thickness (Max)="0.039\" (1.00mm)"
C37 C39 C41 C57 C78: library part KAM15AR71H104JT, "CAP CER 0.1UF 50V X7R 0603", Device Package="0603 (1608 Metric)", manufacturer="KYOCERA AVX", Operating Temperature="-55°C ~ 125°C", Ratings=AEC-Q200, Supplier Part Number 1=478-KAM15AR71H104JTCT-ND, Temperature Coefficient=X7R, Tolerance=±5%, Voltage - Rated=50V, Applications=Automotive, Capacitance="0.1 µF", componentlink1description=Datasheet, componentlink1url=https://datasheets.kyocera-avx.com/AutoMLCC.pdf, componentlink2description="DigiKey Link", componentlink2url=https://www.digikey.com/en/products/detail/kyocera-avx/KAM15AR71H104JT/3080614, lastupdated="09/02/2024 20:09:10", Lifecycle Status=Active, Minimum Order=1, Mounting Type="Surface Mount, MLCC", Package / Case="0603 (1608 Metric)", packaging=TapeAndReel, Part Number=KAM15AR71H104JT, Part Status=Active, partid=54247, price=0.10, series=-, Size / Dimension="0.063\" L x 0.032\" W (1.60mm x 0.81mm)", Supplier 1=DigiKey, Thickness (Max)="0.035\" (0.90mm)"
C43: library part GRM188Z71E225KE43D, "CAP CER 2.2UF 25V X7R 0603", Device Package="0603 (1608 Metric)", manufacturer="Murata Electronics", Operating Temperature="-55°C ~ 125°C", Supplier Part Number 1=490-GRM188Z71E225KE43DCT-ND, Temperature Coefficient=X7R, Tolerance=±10%, Voltage - Rated=25V, Applications="General Purpose", Capacitance="2.2 µF", componentlink1description=Datasheet, componentlink1url=https://search.murata.co.jp/Ceramy/image/img/A01X/G101/ENG/GRM188Z71E225KE43-01A.pdf, componentlink2description="DigiKey Link", componentlink2url=https://www.digikey.com/en/products/detail/murata-electronics/GRM188Z71E225KE43D/16602147, lastupdated="09/02/2024 20:09:39", Lifecycle Status=Active, Minimum Order=1, Mounting Type="Surface Mount, MLCC", Package / Case="0603 (1608 Metric)", packaging=TapeAndReel, Part Number=GRM188Z71E225KE43D, Part Status=Active, partid=49829, price=0.02, series=GRM, Size / Dimension="0.063\" L x 0.031\" W (1.60mm x 0.80mm)", Supplier 1=DigiKey, Thickness (Max)="0.039\" (1.00mm)"
C44: library part C0603C223J3RAC7867, "CAP CER 0.022UF 25V X7R 0603", Device Package="0603 (1608 Metric)", manufacturer=KEMET, Operating Temperature="-55°C ~ 125°C", Supplier Part Number 1=399-C0603C223J3RAC7867CT-ND, Temperature Coefficient=X7R, Tolerance=±5%, Voltage - Rated=25V, Applications="Bypass, Decoupling", Capacitance="0.022 µF", componentlink1description=Datasheet, componentlink1url=https://api.kemet.com/component-edge/download/datasheet/C0603C223J3RACTU.pdf, componentlink2description="DigiKey Link", componentlink2url=https://www.digikey.com/en/products/detail/kemet/C0603C223J3RAC7867/2200271, lastupdated="09/02/2024 20:09:57", Lifecycle Status=Active, Minimum Order=1, Mounting Type="Surface Mount, MLCC", Package / Case="0603 (1608 Metric)", packaging=TapeAndReel, Part Number=C0603C223J3RAC7867, Part Status=Active, partid=35317, price=0.01, series="SMD Comm X7R", Size / Dimension="0.063\" L x 0.031\" W (1.60mm x 0.80mm)", Supplier 1=DigiKey, Thickness (Max)="0.034\" (0.87mm)"
C45 C46 C51 C52: library part LD035A221FAB2A, "CAP CER 220PF 50V C0G/NP0 0603", Device Package="0603 (1608 Metric)", manufacturer="AVX Corporation", Operating Temperature="-55°C ~ 125°C", Supplier Part Number 1=478-12916-1-ND, Temperature Coefficient="C0G, NP0", Tolerance=±1%, Voltage - Rated=50V, Applications="General Purpose", Capacitance=220pF, componentlink1description=Datasheet, componentlink1url=http://datasheets.avx.com/LD-Series.pdf, componentlink2description="DigiKey Link", componentlink2url=http://digikey.com/product-detail/en/avx-corporation/LD035A221FAB2A/478-12916-1-ND/9949286, lastupdated="02/09/2020 01:03:21", Lifecycle Status=Active, Minimum Order=1, Mounting Type="Surface Mount, MLCC", Package / Case="0603 (1608 Metric)", packaging=TapeAndReel, Part Number=LD035A221FAB2A, Part Status=Active, partid=10391, price=0.20, series=LD, Size / Dimension="0.063\" L x 0.032\" W (1.60mm x 0.81mm)", Supplier 1=DigiKey, Thickness (Max)="0.035\" (0.90mm)"
C47 C48 C49 C50 C53 C54 C55 C56: library part C0603X472K5RAC3316, "CAP CER 4700PF 50V X7R 0603", Device Package="0603 (1608 Metric)", manufacturer=KEMET, Operating Temperature="-55°C ~ 125°C", Ratings=AEC-Q200, Supplier Part Number 1=399-C0603X472K5RAC3316CT-ND, Temperature Coefficient=X7R, Tolerance=±10%, Voltage - Rated=50V, Applications="Automotive, Boardflex Sensitive", Capacitance="4700 pF", componentlink1description=Datasheet, componentlink1url=https://connect.kemet.com:7667/gateway/IntelliData-ComponentDocumentation/1.0/download/datasheet/C0603X472K5RAC3316, componentlink2description="DigiKey Link", componentlink2url=https://www.digikey.com/en/products/detail/kemet/C0603X472K5RAC3316/12082514, Features="Soft Termination", lastupdated="09/02/2024 20:09:41", Lifecycle Status=Active, Minimum Order=1, Mounting Type="Surface Mount, MLCC", Package / Case="0603 (1608 Metric)", packaging=TapeAndReel, Part Number=C0603X472K5RAC3316, Part Status=Active, partid=48440, price=0.06, series="SMD Auto X7R VW80808", Size / Dimension="0.063\" L x 0.031\" W (1.60mm x 0.80mm)", Supplier 1=DigiKey, Thickness (Max)="0.037\" (0.95mm)"